# EAGLE board A13-OLinuXino_WIFI (EAGLE 4.16), part 1 of 3
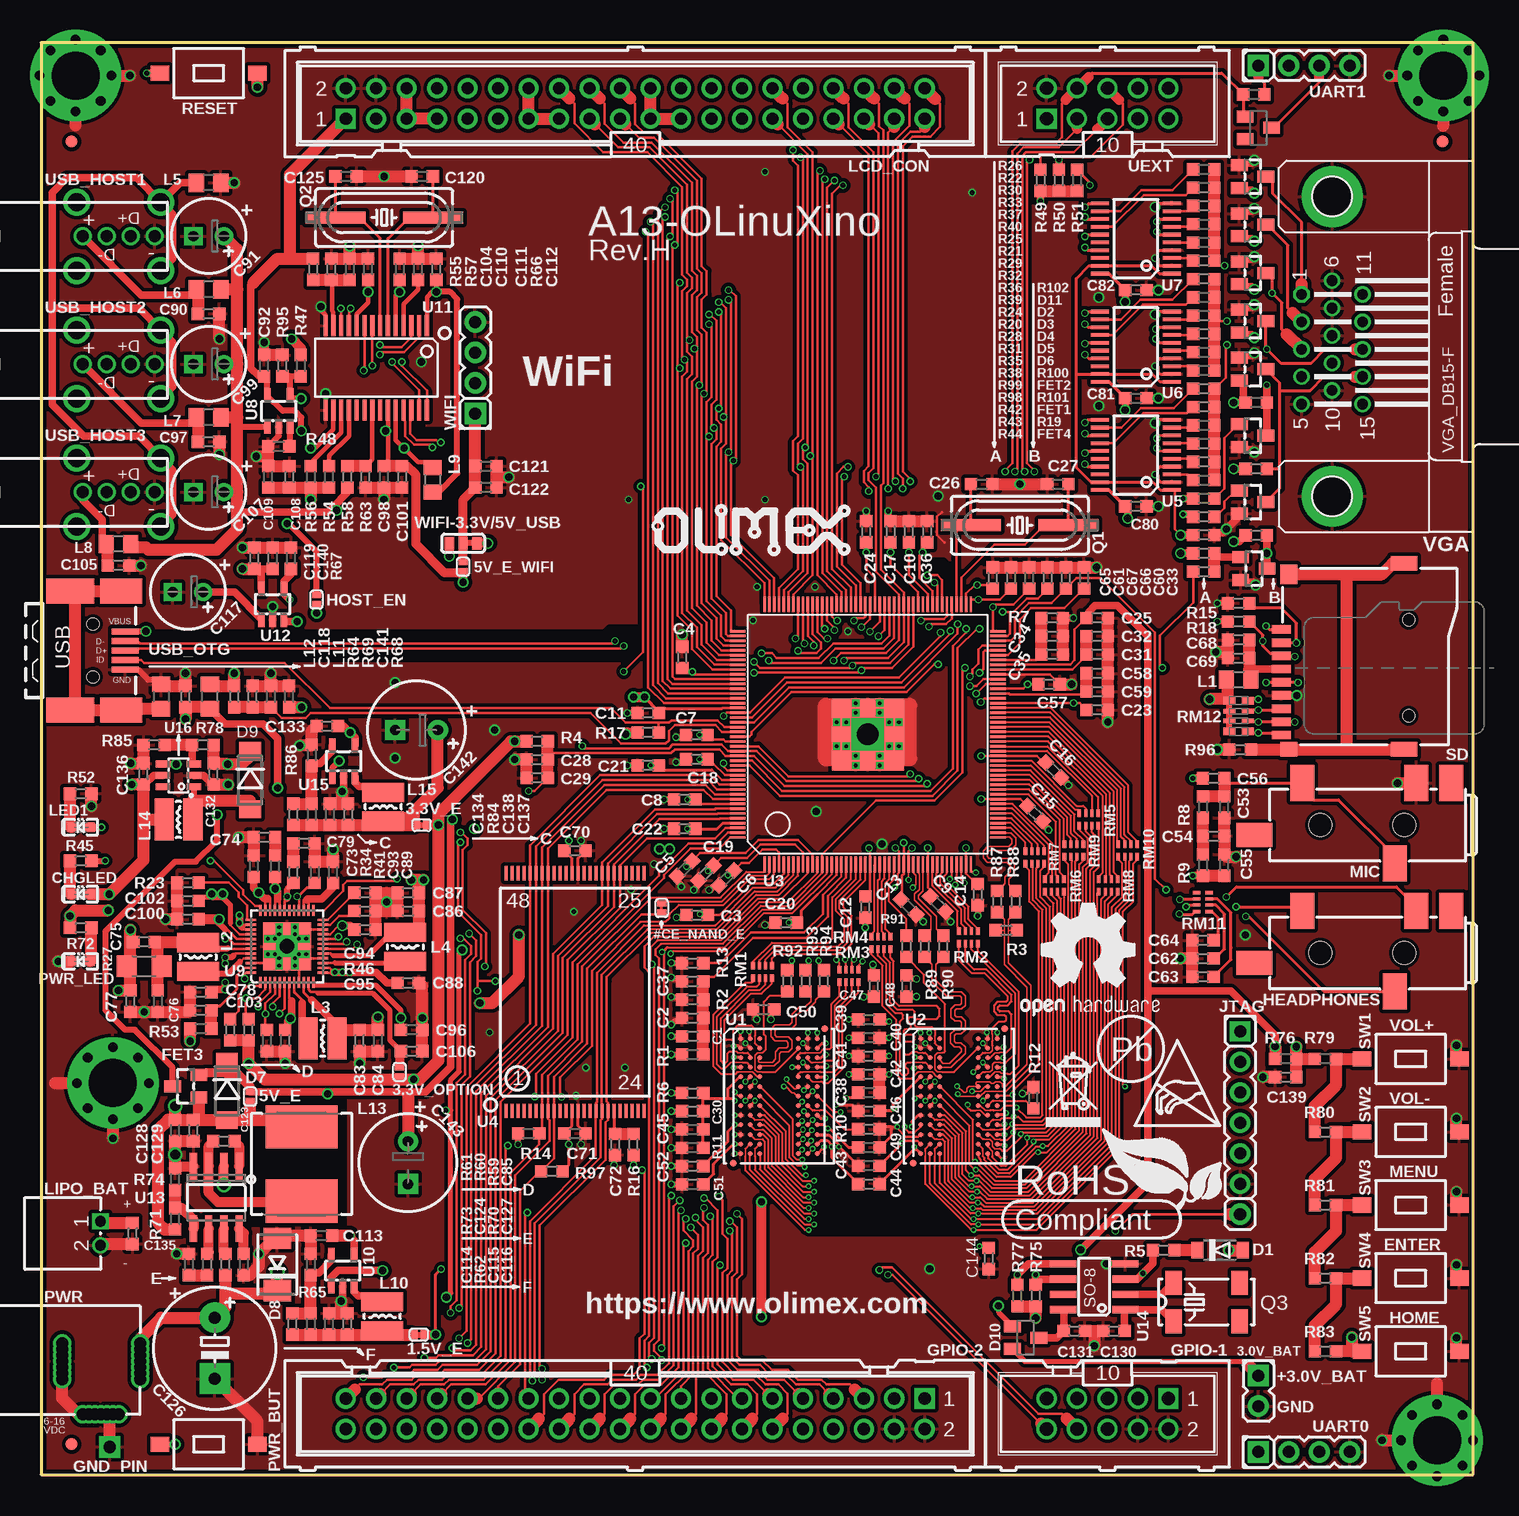
[diagram p0: board, top side]
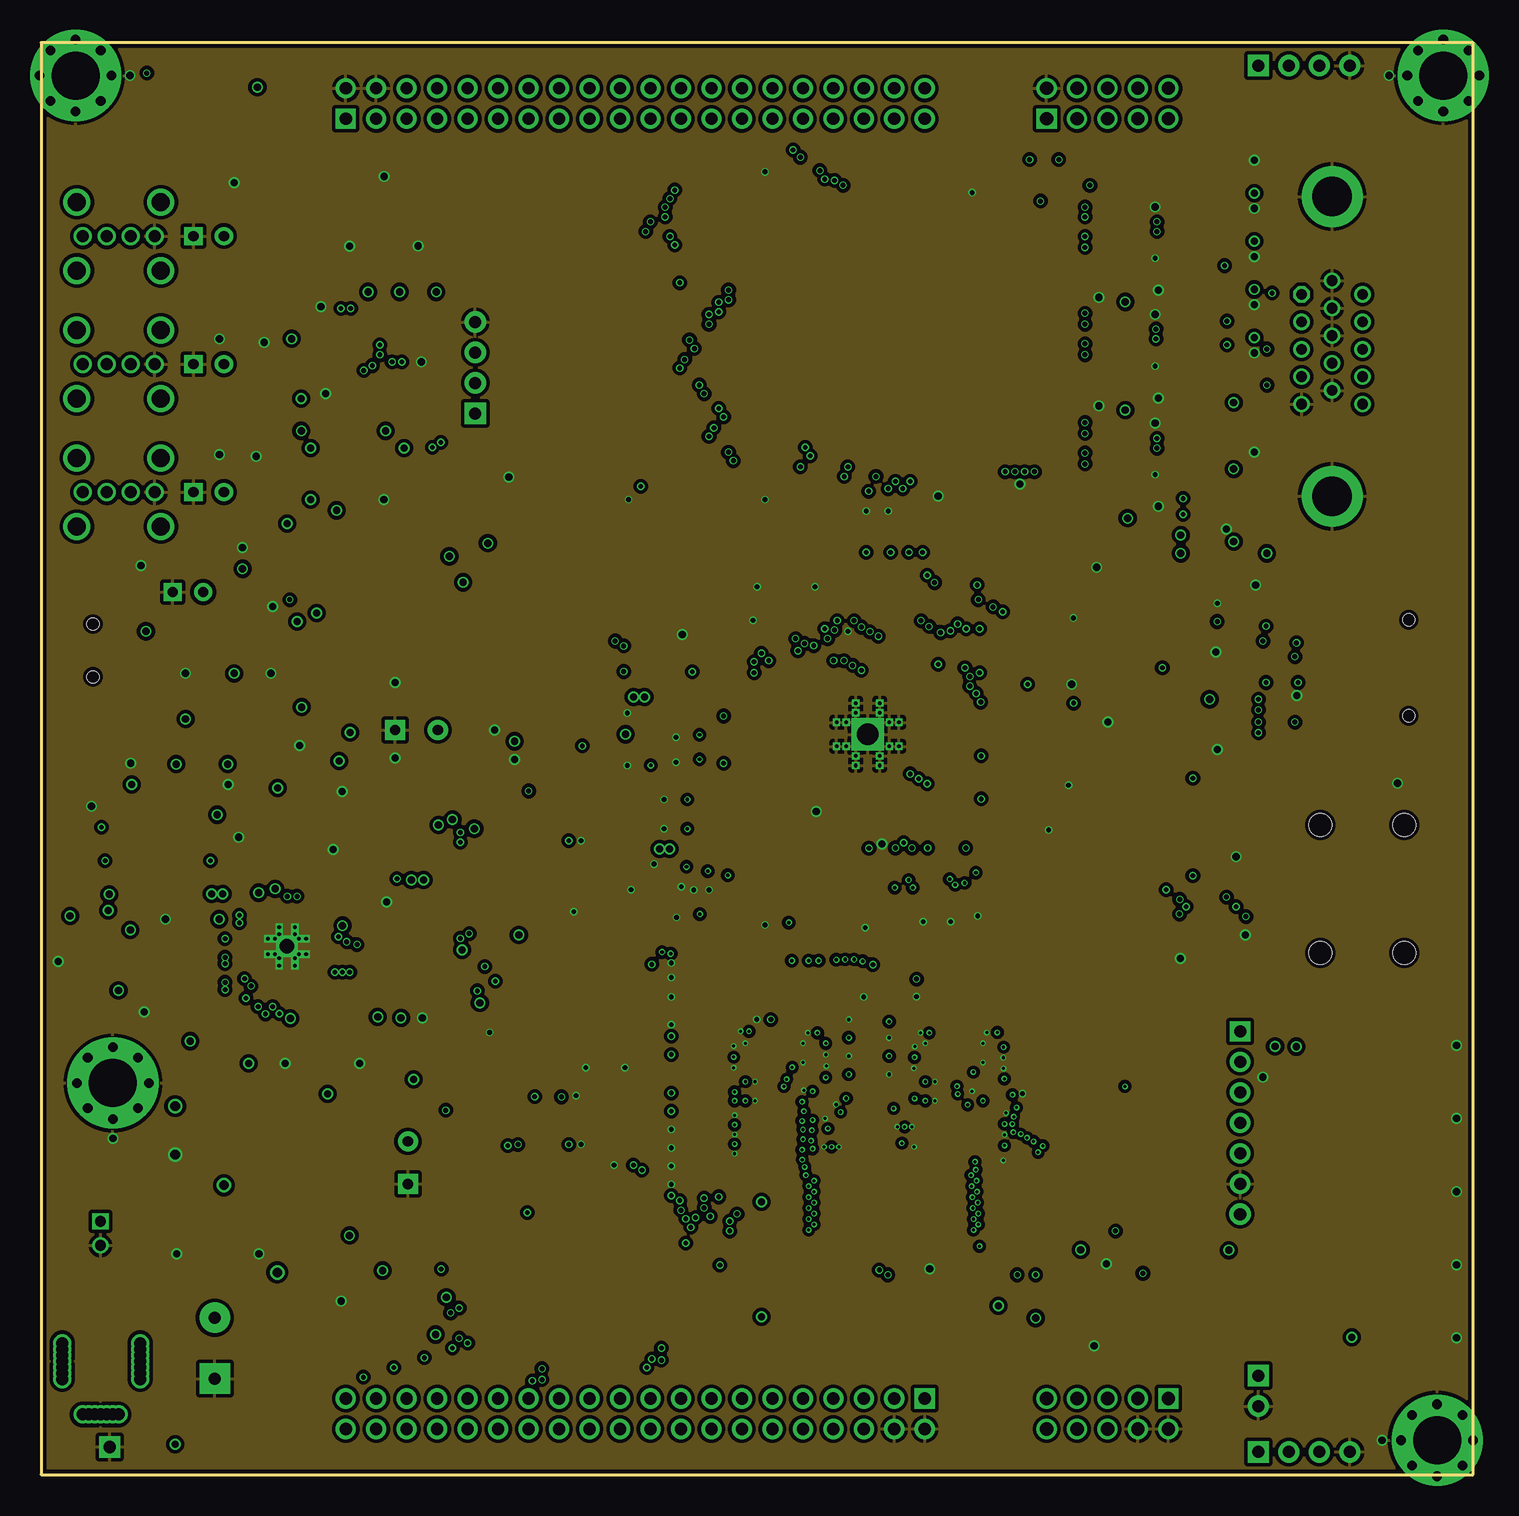
[diagram p1: board, inner layer Route2]
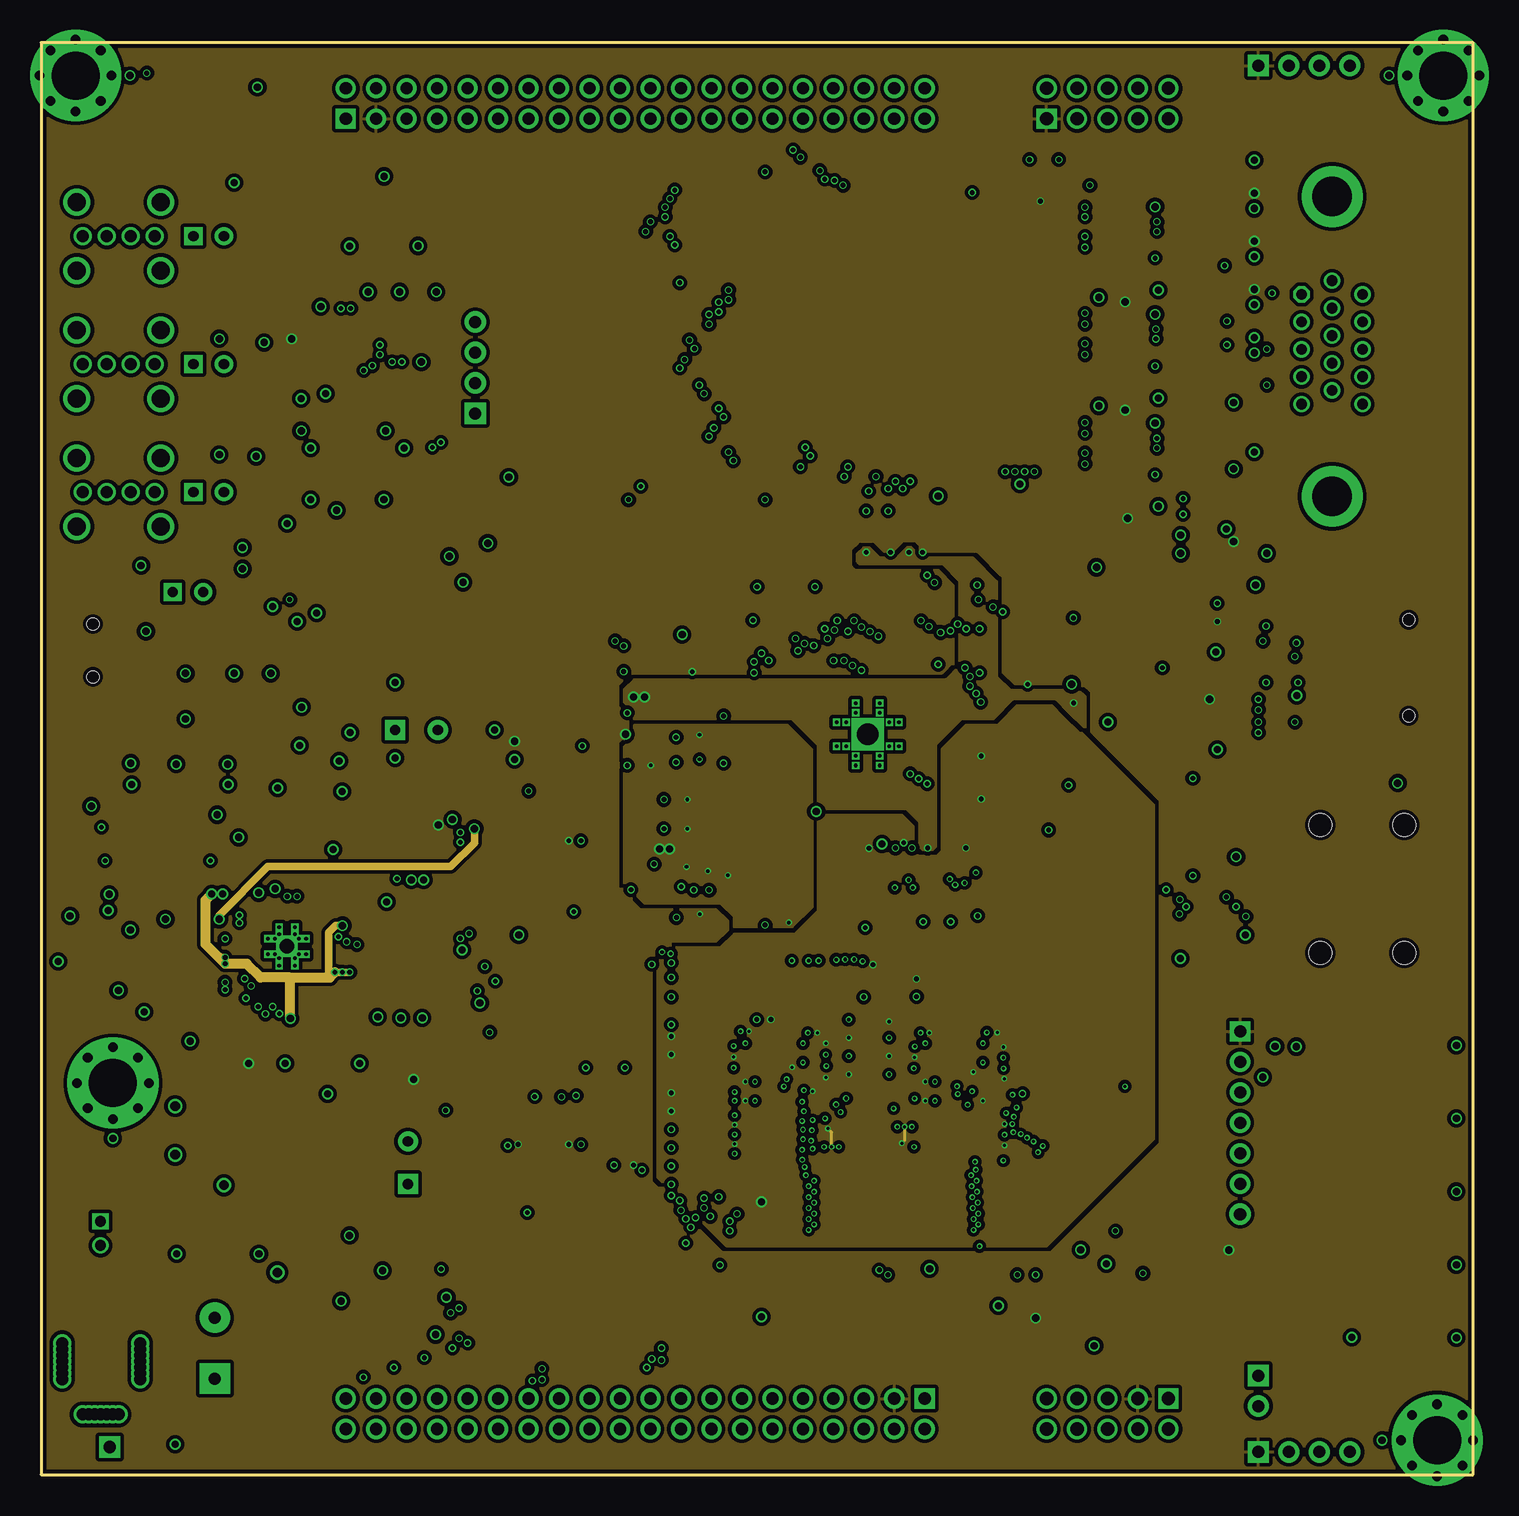
[diagram p2: board, inner layer Route15]
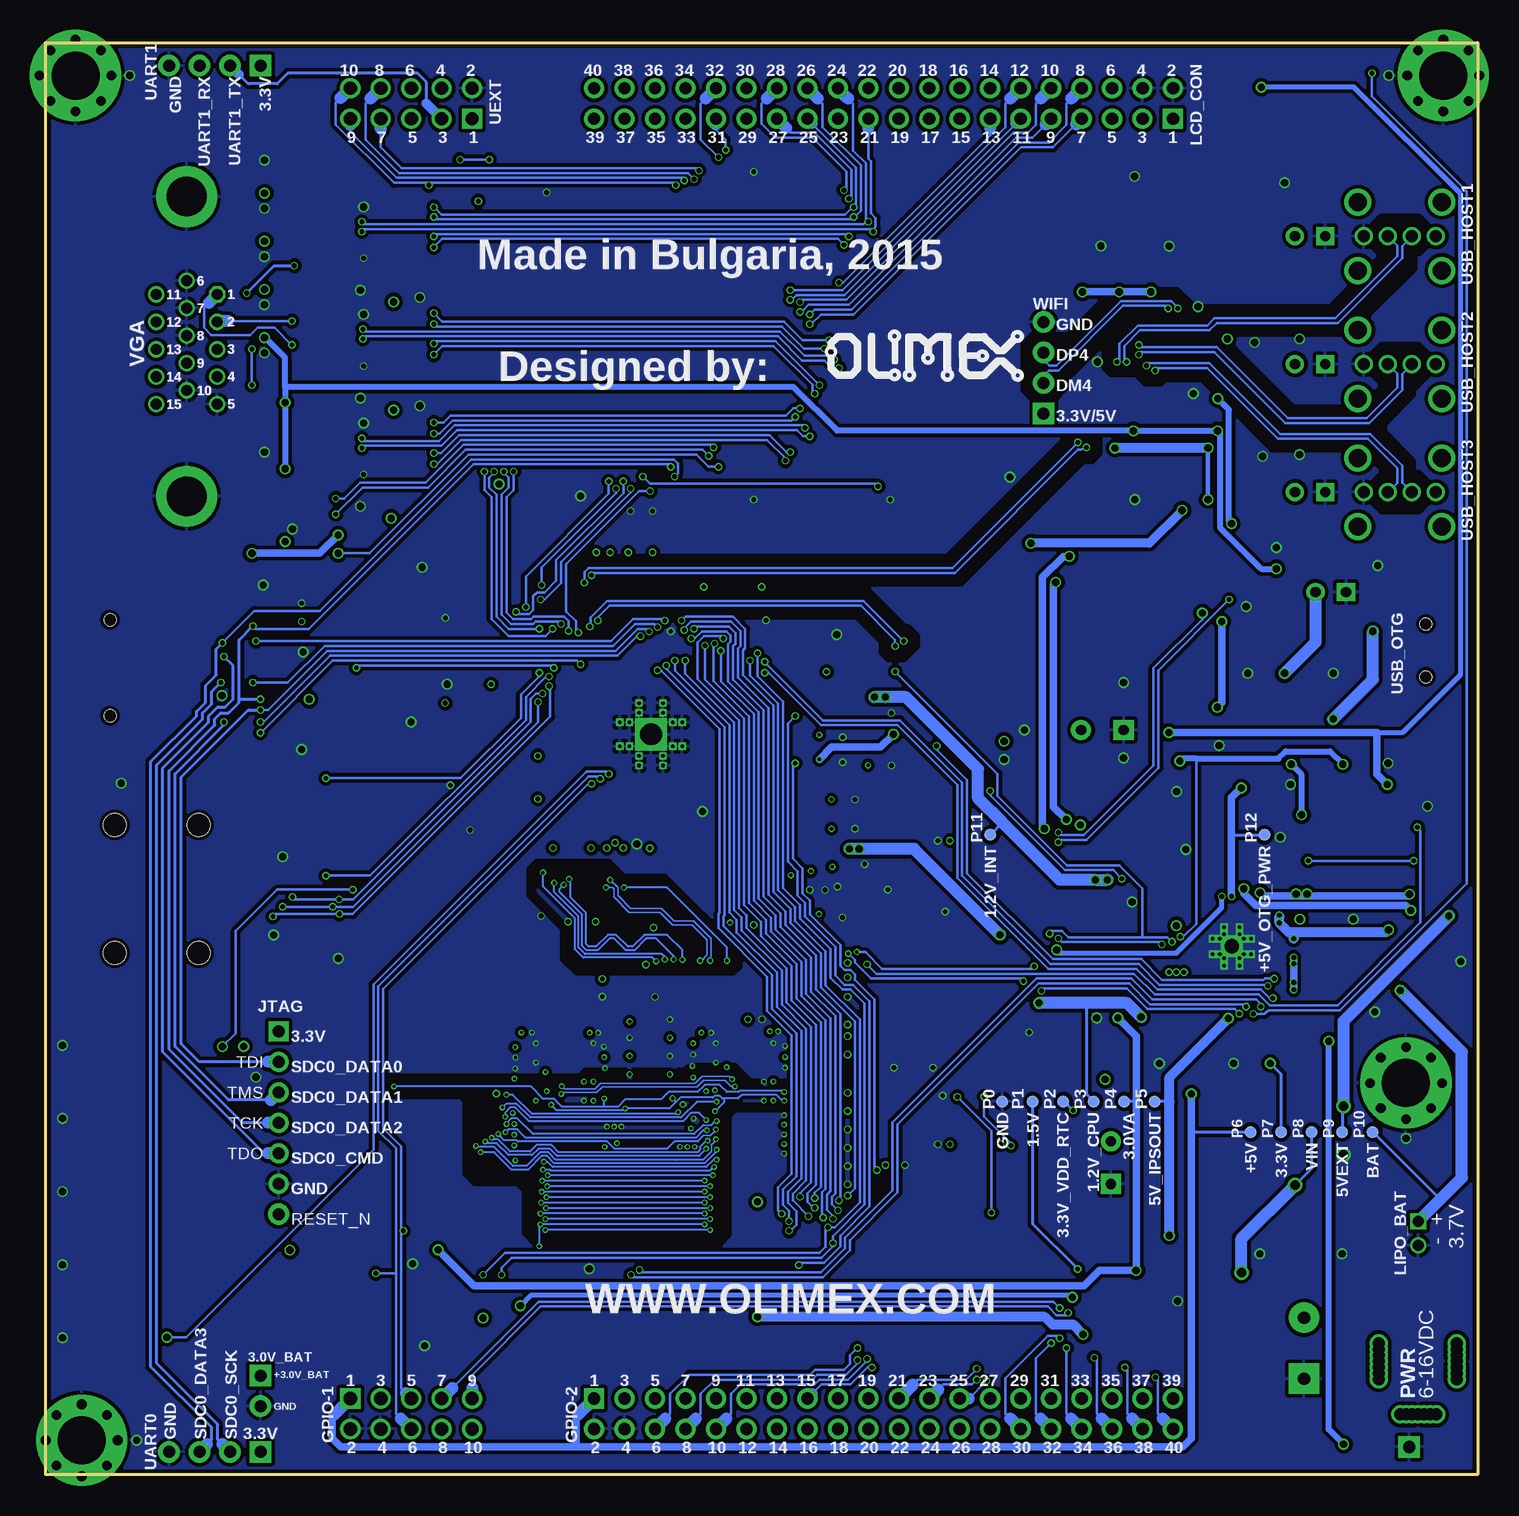
[diagram p3: board, bottom side, seen from below]

Size 119.38 x 119.38 mm. Coordinates in mm from the lower left corner, seen from the top.
Copper layers (1*2*15*16): Top 0.018mm / dielectric 0.12mm / Route2 0.035mm / dielectric 1.2mm / Route15 0.035mm / dielectric 0.12mm / Bottom 0.018mm
Design rules "default": minimum track width 4.5mil, minimum drill 10mil, track to track 0.1321mm, track to pad 0.1321mm, pad to pad 0.1321mm, via to via 0.1321mm, smd to smd 1mil, copper to edge 10mil, drill to drill 8mil, minimum pad ring 6mil, minimum via ring 4mil, stop-mask expansion 4mil, vias tented up to drill 25mil, thermal gap 12mil
tRestrict: 58 lines
bRestrict: 173 lines

## Footprints (pad centres in the part's own frame; a part is rotated, then mirrored left to right if it is on the bottom)
SJ_1_SMALLER_CLOSE = smd 0.508 x 0.762: 1 -0.381,0; 2 0.381,0
HN1X2 = drill 1 pad 1.778 square: 1 -1.27,0 | drill 1 pad 1.778 round: 2 1.27,0
SJ_1_SMALLER = smd 0.508 x 0.762: 1 -0.381,0; 2 0.381,0
SJ_1_SMALLER_CLOSE_10MILS = smd 0.508 x 0.762: 1 -0.381,0; 2 0.381,0
C0603_DWS = smd 1.016 x 1.016: 1 -0.889,0; 2 0.889,0
E2,5-6,3 = drill 0.864 pad 1.524 round: + -1.27,0 | drill 0.864 pad 1.524 square: - 1.27,0
E5-10,5 = drill 1.016 pad 2.54 round: + -2.54,0 | drill 1.016 pad 2.54 square: - 2.54,0
E3,5-8 = drill 0.864 pad 1.676 round: + -1.778,0 | drill 0.864 pad 1.676 square: - 1.778,0
LED-0603_TEST = smd 0.8 x 0.8: A 0.762,0; C -0.762,0
SOD-123 = smd 1 x 1.4: A 1.9,0; C -1.9,0
SOT23C(BAT54S) = smd 1.4 x 1: 1 1.1,-0.95; 2 1.1,0.95; 3 -1.1,0
MLL-41 = smd 1.45 x 1.8: A 2.445,0; K -2.445,0
DO214AA = smd 1.778 x 2.286: A 2.177,0; C -2.177,0
SOT23C = smd 1.4 x 1: 1 1.1,-0.95; 2 1.1,0.95; 3 -1.1,0
SOT23 = smd 1.4 x 1: 1 1.1,-0.95; 2 1.1,0.95; 3 -1.1,0
TEST_PAD40/70/SQUARE = drill 1.016 pad 1.778 square: P$1 0,0
ML10-MALE = drill 1.1 pad 1.676 square: 1 -5.08,-1.27 | drill 1.1 pad 1.676 round: 2 -5.08,1.27; 3 -2.54,-1.27; 4 -2.54,1.27; 5 0,-1.27; 6 0,1.27; 7 2.54,-1.27; 8 2.54,1.27; 9 5.08,-1.27; 10 5.08,1.27
ML40 = drill 1.016 pad 1.676 square: 1 -24.13,-1.27 | drill 1.016 pad 1.676 round: 2 -24.13,1.27; 3 -21.59,-1.27; 4 -21.59,1.27; 5 -19.05,-1.27; 6 -19.05,1.27; 7 -16.51,-1.27; 8 -16.51,1.27; 9 -13.97,-1.27; 10 -13.97,1.27; 11 -11.43,-1.27; 12 -11.43,1.27; 13 -8.89,-1.27; 14 -8.89,1.27; 15 -6.35,-1.27; 16 -6.35,1.27; 17 -3.81,-1.27; 18 -3.81,1.27; 19 -1.27,-1.27; 20 -1.27,1.27; 21 1.27,-1.27; 22 1.27,1.27; 23 3.81,-1.27; 24 3.81,1.27; 25 6.35,-1.27; 26 6.35,1.27; 27 8.89,-1.27; 28 8.89,1.27; 29 11.43,-1.27; 30 11.43,1.27; 31 13.97,-1.27; 32 13.97,1.27; 33 16.51,-1.27; 34 16.51,1.27; 35 19.05,-1.27; 36 19.05,1.27; 37 21.59,-1.27; 38 21.59,1.27; 39 24.13,-1.27; 40 24.13,1.27
PJ-W47S-05D2-LF_5PIN_V2 = smd 2 x 3: 1 2.1,-0.5; 2 14.5,-0.5; 3 6.8,6.2; 5 5,-0.5 | smd 3 x 2: 4 18.5,3.8 | hole 1.9: 6,3; 13,3
HN1X6 = drill 1 pad 1.676 square: 1 -6.35,0 | drill 1 pad 1.676 round: 2 -3.81,0; 3 -1.27,0; 4 1.27,0; 5 3.81,0; 6 6.35,0
L0805_5MIL_DWS = smd 1.27 x 1.524: 1 -1.016,0; 2 1.016,0
CD32 = smd 1.6 x 3.5: 1 -1.2,0; 2 1.2,0
8X8MM_3131 = smd 3.6 x 6: 1 -3.1,0; 2 3.1,0
DW02R = drill 0.9 square: 1 -1,0 | drill 0.9 round: 2 1,0
TESTPAD_40-ROUND = smd 1.016 x 1.016: 1 0,0
PWR_JACK_UNI_MILLING = drill 1 round: + 0,4.75; +1 0,5.25; +2 0,5.75; +3 0,6.25; +4 0,4.25; +5 0,3.75; +6 0,3.25; - -6.5,4.75; -1 -6.5,5.25; -2 -6.5,5.75; -3 -6.5,4.25; -4 -6.5,3.75; -5 -6.5,6.25; -6 -6.5,3.25; -- -3.3,0.3; --1 -3.8,0.3; --2 -4.3,0.3; --3 -4.8,0.3; --4 -2.8,0.3; --5 -2.3,0.3; --6 -1.8,0.3
SW-TAKT_6X3.5_SMD = smd 1.27 x 1.524: P$1 0,4.064; P$2 0,-4.064
HC49/SMD2_THIN = smd 5 x 1: 1 -4.064,0; 2 4.064,0
MC-306_TEST = smd 1.4 x 2: 1 -2.75,-1.6; 2 2.75,-1.6; 3 2.75,1.6; 4 -2.75,1.6
R0603_5MIL_DWS = smd 1.016 x 1.016: 1 -0.889,0; 2 0.889,0
R1206_5MIL_WS = smd 1.651 x 1.778: 1 -1.46,0; 2 1.46,0
TESTPAD = drill 1.016 pad 1.778 round: P$1 0,0
R_MATRIX_4_0402_25X625_BIGGEROUTPADS = smd 0.325 x 0.625: 1.1 -0.79,-0.512; 1.2 -0.79,0.512; 4.1 0.79,-0.512; 4.2 0.79,0.512 | smd 0.25 x 0.625: 2.1 -0.25,-0.512; 2.2 -0.25,0.512; 3.1 0.25,-0.512; 3.2 0.25,0.512
R_MATRIX_4 = smd 0.635 x 1.016: 1.1 -1.27,-0.762; 1.2 -1.27,0.762; 4.1 1.27,-0.762; 4.2 1.27,0.762 | smd 0.381 x 1.016: 2.1 -0.381,-0.762; 2.2 -0.381,0.762; 3.1 0.381,-0.762; 3.2 0.381,0.762
TFC-WPAPR-08 = smd 1.6 x 0.7: 1 -7.375,2.25; 2 -7.375,1.15; 3 -7.375,0.05; 4 -7.375,-1.05; 5 -7.375,-2.15; 6 -7.375,-3.25; 7 -7.375,-4.35; 8 -7.375,-5.45; 9 -7.375,-6.55 | smd 1.4 x 1.2: 10 -6.75,-7.75 | smd 1.4 x 1.6: 11 -6.75,6.85 | smd 2.2 x 1.2: 12 2.85,-7.75; 13 2.85,7.75 | hole 1: 3.25,-4.95; 3.25,3.05
FBGA78 = smd 0.4 x 0.4: A1 -4.8,-3.2; A2 -4.8,-2.4; A3 -4.8,-1.6; A7 -4.8,1.6; A8 -4.8,2.4; A9 -4.8,3.2; B1 -4,-3.2; B2 -4,-2.4; B3 -4,-1.6; B7 -4,1.6; B8 -4,2.4; B9 -4,3.2; C1 -3.2,-3.2; C2 -3.2,-2.4; C3 -3.2,-1.6; C7 -3.2,1.6; C8 -3.2,2.4; C9 -3.2,3.2; D1 -2.4,-3.2; D2 -2.4,-2.4; D3 -2.4,-1.6; D7 -2.4,1.6; D8 -2.4,2.4; D9 -2.4,3.2; E1 -1.6,-3.2; E2 -1.6,-2.4; E3 -1.6,-1.6; E7 -1.6,1.6; E8 -1.6,2.4; E9 -1.6,3.2; F1 -0.8,-3.2; F2 -0.8,-2.4; F3 -0.8,-1.6; F7 -0.8,1.6; F8 -0.8,2.4; F9 -0.8,3.2; G1 0,-3.2; G2 0,-2.4; G3 0,-1.6; G7 0,1.6; G8 0,2.4; G9 0,3.2; H1 0.8,-3.2; H2 0.8,-2.4; H3 0.8,-1.6; H7 0.8,1.6; H8 0.8,2.4; H9 0.8,3.2; J1 1.6,-3.2; J2 1.6,-2.4; J3 1.6,-1.6; J7 1.6,1.6; J8 1.6,2.4; J9 1.6,3.2; K1 2.4,-3.2; K2 2.4,-2.4; K3 2.4,-1.6; K7 2.4,1.6; K8 2.4,2.4; K9 2.4,3.2; L1 3.2,-3.2; L2 3.2,-2.4; L3 3.2,-1.6; L7 3.2,1.6; L8 3.2,2.4; L9 3.2,3.2; M1 4,-3.2; M2 4,-2.4; M3 4,-1.6; M7 4,1.6; M8 4,2.4; M9 4,3.2; N1 4.8,-3.2; N2 4.8,-2.4; N3 4.8,-1.6; N7 4.8,1.6; N8 4.8,2.4; N9 4.8,3.2 | smd 0.6 x 0.6: FID1 5.6,-3.8; FID2 -5.6,3.8
TQFP176 = smd 0.2 x 1.3: 1 -8.6,-10.85; 2 -8.2,-10.85; 3 -7.8,-10.85; 4 -7.4,-10.85; 5 -7,-10.85; 6 -6.6,-10.85; 7 -6.2,-10.85; 8 -5.8,-10.85; 9 -5.4,-10.85; 10 -5,-10.85; 11 -4.6,-10.85; 12 -4.2,-10.85; 13 -3.8,-10.85; 14 -3.4,-10.85; 15 -3,-10.85; 16 -2.6,-10.85; 17 -2.2,-10.85; 18 -1.8,-10.85; 19 -1.4,-10.85; 20 -1,-10.85; 21 -0.6,-10.85; 22 -0.2,-10.85; 23 0.2,-10.85; 24 0.6,-10.85; 25 1,-10.85; 26 1.4,-10.85; 27 1.8,-10.85; 28 2.2,-10.85; 29 2.6,-10.85; 30 3,-10.85; 31 3.4,-10.85; 32 3.8,-10.85; 33 4.2,-10.85; 34 4.6,-10.85; 35 5,-10.85; 36 5.4,-10.85; 37 5.8,-10.85; 38 6.2,-10.85; 39 6.6,-10.85; 40 7,-10.85; 41 7.4,-10.85; 42 7.8,-10.85; 43 8.2,-10.85; 44 8.6,-10.85; 89 8.6,10.85; 90 8.2,10.85; 91 7.8,10.85; 92 7.4,10.85; 93 7,10.85; 94 6.6,10.85; 95 6.2,10.85; 96 5.8,10.85; 97 5.4,10.85; 98 5,10.85; 99 4.6,10.85; 100 4.2,10.85; 101 3.8,10.85; 102 3.4,10.85; 103 3,10.85; 104 2.6,10.85; 105 2.2,10.85; 106 1.8,10.85; 107 1.4,10.85; 108 1,10.85; 109 0.6,10.85; 110 0.2,10.85; 111 -0.2,10.85; 112 -0.6,10.85; 113 -1,10.85; 114 -1.4,10.85; 115 -1.8,10.85; 116 -2.2,10.85; 117 -2.6,10.85; 118 -3,10.85; 119 -3.4,10.85; 120 -3.8,10.85; 121 -4.2,10.85; 122 -4.6,10.85; 123 -5,10.85; 124 -5.4,10.85; 125 -5.8,10.85; 126 -6.2,10.85; 127 -6.6,10.85; 128 -7,10.85; 129 -7.4,10.85; 130 -7.8,10.85; 131 -8.2,10.85; 132 -8.6,10.85 | smd 1.3 x 0.2: 45 10.85,-8.6; 46 10.85,-8.2; 47 10.85,-7.8; 48 10.85,-7.4; 49 10.85,-7; 50 10.85,-6.6; 51 10.85,-6.2; 52 10.85,-5.8; 53 10.85,-5.4; 54 10.85,-5; 55 10.85,-4.6; 56 10.85,-4.2; 57 10.85,-3.8; 58 10.85,-3.4; 59 10.85,-3; 60 10.85,-2.6; 61 10.85,-2.2; 62 10.85,-1.8; 63 10.85,-1.4; 64 10.85,-1; 65 10.85,-0.6; 66 10.85,-0.2; 67 10.85,0.2; 68 10.85,0.6; 69 10.85,1; 70 10.85,1.4; 71 10.85,1.8; 72 10.85,2.2; 73 10.85,2.6; 74 10.85,3; 75 10.85,3.4; 76 10.85,3.8; 77 10.85,4.2; 78 10.85,4.6; 79 10.85,5; 80 10.85,5.4; 81 10.85,5.8; 82 10.85,6.2; 83 10.85,6.6; 84 10.85,7; 85 10.85,7.4; 86 10.85,7.8; 87 10.85,8.2; 88 10.85,8.6; 133 -10.85,8.6; 134 -10.85,8.2; 135 -10.85,7.8; 136 -10.85,7.4; 137 -10.85,7; 138 -10.85,6.6; 139 -10.85,6.2; 140 -10.85,5.8; 141 -10.85,5.4; 142 -10.85,5; 143 -10.85,4.6; 144 -10.85,4.2; 145 -10.85,3.8; 146 -10.85,3.4; 147 -10.85,3; 148 -10.85,2.6; 149 -10.85,2.2; 150 -10.85,1.8; 151 -10.85,1.4; 152 -10.85,1; 153 -10.85,0.6; 154 -10.85,0.2; 155 -10.85,-0.2; 156 -10.85,-0.6; 157 -10.85,-1; 158 -10.85,-1.4; 159 -10.85,-1.8; 160 -10.85,-2.2; 161 -10.85,-2.6; 162 -10.85,-3; 163 -10.85,-3.4; 164 -10.85,-3.8; 165 -10.85,-4.2; 166 -10.85,-4.6; 167 -10.85,-5; 168 -10.85,-5.4; 169 -10.85,-5.8; 170 -10.85,-6.2; 171 -10.85,-6.6; 172 -10.85,-7; 173 -10.85,-7.4; 174 -10.85,-7.8; 175 -10.85,-8.2; 176 -10.85,-8.6 | smd 6 x 6: GND_PAD 0,0 | drill 1.8 pad 2.184 square: P$2 0,0 | drill 0.3 pad 0.406 square: P$3 -2.6,-1; P$4 -1.8,-1; P$5 -1,-2.6; P$6 -1,-1.8; P$7 1,-2.6; P$8 1,-1.8; P$9 2.6,-1; P$10 1.8,-1; P$11 -2.6,1; P$12 -1.8,1; P$13 2.6,1; P$14 1.8,1; P$15 -1,2.6; P$16 -1,1.8; P$17 1,2.6; P$18 1,1.8
TSOP48 = smd 1.2 x 0.25: 1 -9.9,5.75; 2 -9.9,5.25; 3 -9.9,4.75; 4 -9.9,4.25; 5 -9.9,3.75; 6 -9.9,3.25; 7 -9.9,2.75; 8 -9.9,2.25; 9 -9.9,1.75; 10 -9.9,1.25; 11 -9.9,0.75; 12 -9.9,0.25; 13 -9.9,-0.25; 14 -9.9,-0.75; 15 -9.9,-1.25; 16 -9.9,-1.75; 17 -9.9,-2.25; 18 -9.9,-2.75; 19 -9.9,-3.25; 20 -9.9,-3.75; 21 -9.9,-4.25; 22 -9.9,-4.75; 23 -9.9,-5.25; 24 -9.9,-5.75; 25 9.9,-5.75; 26 9.9,-5.25; 27 9.9,-4.75; 28 9.9,-4.25; 29 9.9,-3.75; 30 9.9,-3.25; 31 9.9,-2.75; 32 9.9,-2.25; 33 9.9,-1.75; 34 9.9,-1.25; 35 9.9,-0.75; 36 9.9,-0.25; 37 9.9,0.25; 38 9.9,0.75; 39 9.9,1.25; 40 9.9,1.75; 41 9.9,2.25; 42 9.9,2.75; 43 9.9,3.25; 44 9.9,3.75; 45 9.9,4.25; 46 9.9,4.75; 47 9.9,5.25; 48 9.9,5.75
PW = smd 0.3 x 1.5: 1 -2.925,-3; 2 -2.275,-3; 3 -1.625,-3; 4 -0.975,-3; 5 -0.325,-3; 6 0.325,-3; 7 0.975,-3; 8 1.625,-3; 9 2.275,-3; 10 2.925,-3; 11 2.925,3; 12 2.275,3; 13 1.625,3; 14 0.975,3; 15 0.325,3; 16 -0.325,3; 17 -0.975,3; 18 -1.625,3; 19 -2.275,3; 20 -2.925,3
SOT23-5 = smd 1.2 x 0.55: 1 1.3,-0.95; 2 1.3,0; 3 1.3,0.95; 4 -1.3,0.95; 5 -1.3,-0.95
QFN48 = smd 0.2 x 0.9: 1 -2.2,-3; 2 -1.8,-3; 3 -1.4,-3; 4 -1,-3; 5 -0.6,-3; 6 -0.2,-3; 7 0.2,-3; 8 0.6,-3; 9 1,-3; 10 1.4,-3; 11 1.8,-3; 12 2.2,-3; 25 2.2,3; 26 1.8,3; 27 1.4,3; 28 1,3; 29 0.6,3; 30 0.2,3; 31 -0.2,3; 32 -0.6,3; 33 -1,3; 34 -1.4,3; 35 -1.8,3; 36 -2.2,3 | smd 0.9 x 0.2: 13 3,-2.2; 14 3,-1.8; 15 3,-1.4; 16 3,-1; 17 3,-0.6; 18 3,-0.2; 19 3,0.2; 20 3,0.6; 21 3,1; 22 3,1.4; 23 3,1.8; 24 3,2.2; 37 -3,2.2; 38 -3,1.8; 39 -3,1.4; 40 -3,1; 41 -3,0.6; 42 -3,0.2; 43 -3,-0.2; 44 -3,-0.6; 45 -3,-1; 46 -3,-1.4; 47 -3,-1.8; 48 -3,-2.2 | drill 1.2 pad 1.422 square: N1 0,0 | drill 0.3 pad 0.4 square: N2 -1.6,0.65; N3 -1,0.65; N4 -1.6,-0.65; N5 -1,-0.65; N6 -0.65,-1.6; N7 -0.65,-1; N8 0.65,-1.6; N9 0.65,-1; N10 1.6,-0.65; N11 1,-0.65; N12 1.6,0.65; N13 1,0.65; N14 0.65,1.6; N15 0.65,1; N16 -0.65,1.6; N17 -0.65,1 | smd 4 x 4: VSS 0,0
SSOP28 = smd 0.35 x 1.75: 1 -4.225,-3.525; 2 -3.575,-3.525; 3 -2.925,-3.525; 4 -2.275,-3.525; 5 -1.625,-3.525; 6 -0.975,-3.525; 7 -0.325,-3.525; 8 0.325,-3.525; 9 0.975,-3.525; 10 1.625,-3.525; 11 2.275,-3.525; 12 2.925,-3.525; 13 3.575,-3.525; 14 4.225,-3.525; 15 4.225,3.525; 16 3.575,3.525; 17 2.925,3.525; 18 2.275,3.525; 19 1.625,3.525; 20 0.975,3.525; 21 0.325,3.525; 22 -0.325,3.525; 23 -0.975,3.525; 24 -1.625,3.525; 25 -2.275,3.525; 26 -2.925,3.525; 27 -3.575,3.525; 28 -4.225,3.525
SOIC8 = smd 0.6 x 2.2: 1 -1.905,-2.6; 2 -0.635,-2.6; 3 0.635,-2.6; 4 1.905,-2.6; 5 1.905,2.6; 6 0.635,2.6; 7 -0.635,2.6; 8 -1.905,2.6
SO-8 = smd 0.6 x 2.2: 1 -1.905,-2.6; 2 -0.635,-2.6; 3 0.635,-2.6; 4 1.905,-2.6; 5 1.905,2.6; 6 0.635,2.6; 7 -0.635,2.6; 8 -1.905,2.6
SOT23-6 = smd 1.2 x 0.55: 1 1.3,-0.95; 2 1.3,0; 3 1.3,0.95; 4 -1.3,0.95; 5 -1.3,0; 6 -1.3,-0.95
FIDUCIAL-1X2 = smd 1 x 1: 1 0,0
NANO-ITX_120X120 = drill 4 pad 7.6 round: GND 2.496,2.746; P$2 3.006,116.506; P$3 116.506,2.746; P$4 113.396,86.726 | drill 0.8 round: P$11 -0.504,2.746; P$12 5.496,2.746; P$13 2.496,5.746; P$14 2.496,-0.254; P$15 0.396,0.646; P$16 4.596,0.646; P$17 4.596,4.846; P$18 0.396,4.846; P$20 0.006,116.506; P$21 6.006,116.506; P$22 3.006,119.506; P$23 3.006,113.506; P$24 0.906,114.406; P$25 5.106,114.406; P$26 5.106,118.606; P$27 0.906,118.606; P$29 113.506,2.746; P$30 119.506,2.746; P$31 116.506,5.746; P$32 116.506,-0.254; P$33 114.406,0.646; P$34 118.606,0.646; P$35 118.606,4.846; P$36 114.406,4.846; P$38 110.396,86.726; P$39 116.396,86.726; P$40 113.396,89.726; P$41 113.396,83.726; P$42 111.296,84.626; P$43 115.496,84.626; P$44 115.496,88.826; P$45 111.296,88.826
HN1X4 = drill 1 pad 1.778 square: 1 -3.81,0 | drill 1 pad 1.778 round: 2 -1.27,0; 3 1.27,0; 4 3.81,0
USB_A_VERTICAL_PTH = drill 1 round: 1 3.45,12.75; 2 3.45,14.75; 3 3.45,16.75; 4 3.45,18.75 | drill 1.5 round: P$1 0.6,12.25; P$2 6.3,12.25; P$3 6.3,19.25; P$4 0.6,19.25
USB_MINI_9PIN = smd 2.25 x 0.5: D+ -3.722,0; D- -3.722,-0.8; GND -3.722,1.6; ID -3.722,0.8; VBUS -3.722,-1.6 | smd 4 x 2.1: GND1 0.884,-4.95; GND3 0.884,4.95 | smd 3.5 x 2.1: GND2 -3.366,-4.95; GND4 -3.366,4.95 | hole 1: -1.016,-2.2; -1.016,2.2
DB15-F_22MM = drill 0.9 octagon: 1 4.329,6.35 | drill 0.9 round: 2 2.043,6.35; 3 -0.243,6.35; 4 -2.529,6.35; 5 -4.815,6.35; 6 5.472,3.81; 7 3.186,3.81; 8 0.9,3.81; 9 -1.386,3.81; 10 -3.672,3.81; 11 4.329,1.27; 12 2.043,1.27; 13 -0.243,1.27; 14 -2.529,1.27; 15 -4.815,1.27 | drill 3.302 pad 5.08 round: GND1 -12.497,3.81; GND2 12.497,3.81
SJ_2_SMALL_12_TIED = smd 0.762 x 1.016: 1 -1.143,0; 2 0,0; 3 1.143,0

## Placement (x,y rotation side)
1.5V_E  Close  [SJ_1_SMALLER_CLOSE]  31.5,11.68 0 top
3.0V_BAT  NA(HN1X2)  [HN1X2]  101.47,6.99 270 top
3.3V_E  Close  [SJ_1_SMALLER_CLOSE]  31.72,54.15 0 top
3.3V_OPTION  Open  [SJ_1_SMALLER]  29.87,33.58 270 top
5V_E  Open  [SJ_1_SMALLER]  17.42,31.52 90 top
5V_E_WIFI  Open  [SJ_1_SMALLER]  35.18,75.69 90 top
#CE_NAND_E  Close  [SJ_1_SMALLER_CLOSE_10MILS]  51.74,47.24 90 top
C1  100nF  [C0603_DWS]  54.31,36.55 0 top
C2  100nF  [C0603_DWS]  54.31,38.07 0 top
C3  100nF  [C0603_DWS]  54.69,46.66 0 top
C4  100nF  [C0603_DWS]  53.44,68.12 270 top
C5  22uF/6.3V  [C0603_DWS]  53.65,50.52 45 top
C6  10uF/6.3V  [C0603_DWS]  57.14,49.74 45 top
C7  10uF/6.3V  [C0603_DWS]  54.66,61.67 0 top
C8  10uF/6.3V  [C0603_DWS]  53.64,56.29 0 top
C9  22uF/6.3V  [C0603_DWS]  74.75,47.57 135 top
C10  10uF/6.3V  [C0603_DWS]  72.34,78.61 270 top
C11  10uF/6.3V  [C0603_DWS]  50.6,63.5 0 top
C12  22uF/6.3V  [C0603_DWS]  68.71,47.32 90 top
C13  100nF  [C0603_DWS]  72.31,47.32 135 top
C14  10uF/6.3V  [C0603_DWS]  78.08,48.36 90 top
C15  100nF  [C0603_DWS]  82.85,55.12 135 top
C16  10uF/6.3V  [C0603_DWS]  84.38,58.75 135 top
C17  100nF  [C0603_DWS]  70.82,78.61 270 top
C18  22uF/6.3V  [C0603_DWS]  54.66,59.64 0 top
C19  100nF  [C0603_DWS]  55.43,50.16 45 top
C20  100nF  [C0603_DWS]  62.1,46.02 0 top
C21  100nF  [C0603_DWS]  50.6,59.13 0 top
C22  100nF  [C0603_DWS]  53.64,53.85 0 top
C23  100nF  [C0603_DWS]  88.04,63.75 180 top
C24  100nF  [C0603_DWS]  68.78,78.61 270 top
C25  22uF/6.3V  [C0603_DWS]  88.04,71.42 180 top
C26  33pF  [C0603_DWS]  78.41,82.58 180 top
C27  33pF  [C0603_DWS]  84.76,82.58 0 top
C28  1uF  [C0603_DWS]  41.35,59.61 0 top
C29  100nF  [C0603_DWS]  41.35,58.09 0 top
C30  100nF  [C0603_DWS]  54.31,30.3 0 top
C31  10uF/6.3V  [C0603_DWS]  88.04,68.38 180 top
C32  100nF  [C0603_DWS]  88.04,69.9 180 top
C33  1uF  [C0603_DWS]  86.94,74.75 270 top
C34  100nF  [C0603_DWS]  84.28,69.9 180 top
C35  10uF/6.3V  [C0603_DWS]  84.28,68.38 180 top
C36  100nF  [C0603_DWS]  73.86,78.61 270 top
C37  100nF  [C0603_DWS]  54.31,41.12 0 top
C38  100nF  [C0603_DWS]  69.01,31.85 180 top
C39  100nF  [C0603_DWS]  69.01,37.95 0 top
C40  100nF  [C0603_DWS]  69.01,36.42 180 top
C41  100nF  [C0603_DWS]  69.01,34.9 0 top
C42  22uF/6.3V  [C0603_DWS]  69.01,33.38 180 top
C43  100nF  [C0603_DWS]  69.01,25.76 0 top
C44  100nF  [C0603_DWS]  69.01,24.23 180 top
C45  100nF  [C0603_DWS]  54.31,28.78 0 top
C46  100nF  [C0603_DWS]  69.01,30.33 0 top
C47  100nF  [C0603_DWS]  69.42,40.74 90 top
C48  100nF  [C0603_DWS]  72.14,40.74 90 top
C49  100nF  [C0603_DWS]  69.01,27.28 180 top
C50  100nF  [C0603_DWS]  60.22,38.79 0 top
C51  100nF  [C0603_DWS]  54.31,24.21 0 top
C52  22uF/6.3V  [C0603_DWS]  54.31,25.73 0 top
C53  3.3nF  [C0603_DWS]  98.63,55.65 90 top
C54  10uF/6.3V  [C0603_DWS]  97.74,53.24 180 top
C55  10uF/6.3V  [C0603_DWS]  98.63,50.83 270 top
C56  100nF  [C0603_DWS]  97.74,58.06 180 top
C57  100nF  [C0603_DWS]  84.02,65.89 180 top
C58  10uF/6.3V  [C0603_DWS]  88.04,66.8 180 top
C59  100nF  [C0603_DWS]  88.04,65.28 180 top
C60  1nF  [C0603_DWS]  85.42,74.75 270 top
C61  1nF  [C0603_DWS]  80.85,74.75 270 top
C62  100nF  [C0603_DWS]  96.85,43.03 0 top
C63  100nF  [C0603_DWS]  96.85,41.5 0 top
C64  100nF  [C0603_DWS]  96.85,44.55 0 top
C65  1nF  [C0603_DWS]  79.32,74.75 270 top
C66  1nF  [C0603_DWS]  83.9,74.75 270 top
C67  1nF  [C0603_DWS]  82.37,74.75 270 top
C68  22uF/6.3V  [C0603_DWS]  99.82,69.6 0 top
C69  22uF/6.3V  [C0603_DWS]  99.82,68.07 0 top
C70  100nF  [C0603_DWS]  44.5,52.02 180 top
C71  22uF/6.3V  [C0603_DWS]  44.5,28.45 180 top
C72  100nF  [C0603_DWS]  47.85,27.53 90 top
C73  10uF/6.3V  [C0603_DWS]  17.73,50.72 270 top
C74  10uF/6.3V  [C0603_DWS]  18.62,53.14 0 top
C75  1uF  [C0603_DWS]  8.59,44.42 180 top
C76  10uF/6.3V  [C0603_DWS]  9.73,39.47 270 top
C77  10uF/6.3V  [C0603_DWS]  7.44,39.47 270 top
C78  10uF/6.3V  [C0603_DWS]  13.31,40.23 180 top
C79  10uF/6.3V  [C0603_DWS]  21.92,52.63 180 top
C80  100nF  [C0603_DWS]  91.26,80.72 0 top
C81  100nF  [C0603_DWS]  91.26,89.74 0 top
C82  100nF  [C0603_DWS]  91.26,98.76 0 top
C83  10uF/6.3V  [C0603_DWS]  26.54,36.2 270 top
C84  1nF  [C0603_DWS]  28.07,36.2 270 top
C85  10uF/6.3V  [C0603_DWS]  20.35,36.2 270 top
C86  10uF/6.3V  [C0603_DWS]  30.61,46.99 180 top
C87  1nF  [C0603_DWS]  30.61,48.51 180 top
C88  10uF/6.3V  [C0603_DWS]  30.61,41 0 top
C89  1uF  [C0603_DWS]  24.33,50.22 270 top
C90  100nF  [C0603_DWS]  13.97,96.77 0 top
C91  100uF/16V/LOWESR/105C/6.3x11mm_RM2.5  [E2,5-6,3]  13.97,103.25 180 top
C92  10uF/6.3V  [C0603_DWS]  18.59,92.46 90 top
C93  10uF/6.3V  [C0603_DWS]  22.81,50.22 90 top
C94  1uF  [C0603_DWS]  27,48.51 180 top
C95  10uF/6.3V  [C0603_DWS]  27,45.44 180 top
C96  10uF/6.3V  [C0603_DWS]  30.89,37.08 0 top
C97  100nF  [C0603_DWS]  13.97,86.11 0 top
C98  10uF/6.3V  [C0603_DWS]  28.57,83.19 270 top
C99  100uF/16V/LOWESR/105C/6.3x11mm_RM2.5  [E2,5-6,3]  13.97,92.58 180 top
C100  10uF/6.3V  [C0603_DWS]  12.24,46.3 180 top
C101  100nF  [C0603_DWS]  30.1,83.19 270 top
C102  10uF/6.3V  [C0603_DWS]  12.24,47.83 180 top
C103  1nF  [C0603_DWS]  13.31,38.71 0 top
C104  1uF  [C0603_DWS]  25.73,100.48 270 top
C105  100nF  [C0603_DWS]  6.45,75.79 0 top
C106  NA(10uF/6.3V)  [C0603_DWS]  30.89,35.31 0 top
C107  100uF/16V/LOWESR/105C/6.3x11mm_RM2.5  [E2,5-6,3]  13.97,81.92 180 top
C108  100nF  [C0603_DWS]  20.7,83.19 90 top
C109  10uF/6.3V  [C0603_DWS]  18.92,83.19 90 top
C110  100nF  [C0603_DWS]  27.25,100.48 90 top
C111  100nF  [C0603_DWS]  29.9,100.48 90 top
C112  100nF  [C0603_DWS]  32.94,100.48 90 top
C113  22uF/6.3V  [C0603_DWS]  23.37,19.94 180 top
C114  33pF  [C0603_DWS]  20.95,12.57 90 top
C115  22uF/6.3V  [C0603_DWS]  24,12.57 90 top
C116  22uF/6.3V  [C0603_DWS]  25.53,12.57 90 top
C117  100uF/16V/LOWESR/105C/6.3x11mm_RM2.5  [E2,5-6,3]  12.24,73.58 180 top
C118  100nF  [C0603_DWS]  12.04,64.87 90 top
C119  100nF  [C0603_DWS]  17.78,76.4 90 top
C120  33pF  [C0603_DWS]  31.78,108.23 0 top
C121  10uF/6.3V  [C0603_DWS]  37.08,84.07 0 top
C122  100nF  [C0603_DWS]  37.08,82.3 0 top
C123  10nF  [C0603_DWS]  15.24,27.81 180 top
C124  3.3nF  [C0603_DWS]  13.84,17.53 270 top
C125  33pF  [C0603_DWS]  25.43,108.23 180 top
C126  470uF/25V/LOWESR/105C  [E5-10,5]  14.48,10.54 270 top
C127  100nF  [C0603_DWS]  16.89,17.53 270 top
C128  22uF/6.3V  [C0603_DWS]  11.18,28.7 270 top
C129  22uF/6.3V  [C0603_DWS]  12.7,28.7 270 top
C130  10pF  [C0603_DWS]  89.43,11.99 180 top
C131  100nF  [C0603_DWS]  86.13,11.99 180 top
C132  22uF/6.3V  [C0603_DWS]  14.38,58.42 270 top
C133  22uF/6.3V  [C0603_DWS]  23.85,62.41 180 top
C134  33pF  [C0603_DWS]  21.03,55.04 90 top
C135  22uF/6.3V  [C0603_DWS]  7.62,20.12 90 top
C136  22uF/6.3V  [C0603_DWS]  8.53,58.42 270 top
C137  22uF/6.3V  [C0603_DWS]  25.6,55.04 90 top
C138  22uF/6.3V  [C0603_DWS]  24.08,55.04 90 top
C139  1nF  [C0603_DWS]  103.76,33.15 180 top
C140  22uF/6.3V  [C0603_DWS]  19.3,76.4 90 top
C141  100nF  [C0603_DWS]  19.15,64.87 90 top
C142  NA  [E3,5-8]  31.29,62.08 180 top
C143  NA  [E3,5-8]  30.58,26.01 270 top
C144  100pF  [C0603_DWS]  78.99,18.03 270 top
CHGLED  LED/YELLOW/0603  [LED-0603_TEST]  3.3,48.39 0 top
D1  1N5819(S4SOD-123)  [SOD-123]  98.27,18.72 0 top
D2  BAT54S  [SOT23C(BAT54S)]  100.99,108.2 180 top
D3  BAT54S  [SOT23C(BAT54S)]  100.99,104.19 180 top
D4  BAT54S  [SOT23C(BAT54S)]  100.99,100.18 180 top
D5  BAT54S  [SOT23C(BAT54S)]  100.99,96.16 180 top
D6  BAT54S  [SOT23C(BAT54S)]  100.99,92.15 180 top
D7  1N5822/SS34/SMA  [MLL-41]  15.49,32 270 top
D8  SMBJ16A  [DO214AA]  19.68,17.53 90 top
D9  1N5822/SS34/SMA  [MLL-41]  17.42,57.91 270 top
D10  BAT54C  [SOT23C]  82.07,11.43 180 top
D11  BAT54C  [SOT23C]  101.47,112.27 180 top
FET1  BSS138  [SOT23]  100.99,81.08 180 top
FET2  BSS138  [SOT23]  100.99,86.61 180 top
FET3  IRLML6402  [SOT23]  12.06,32.38 0 top
FET4  BSS138  [SOT23]  101.09,75.54 180 top
GND_PIN  TESTPAD3  [TEST_PAD40/70/SQUARE]  5.71,2.31 0 top
GPIO-1  BH10S  [ML10-MALE]  88.9,5.08 180 top
GPIO-2  BH40S  [ML40]  49.53,5.08 180 top
HEADPHONES  PJ-W47S-05D2-LF_V2  [PJ-W47S-05D2-LF_5PIN_V2]  119.63,46.48 180 top
HOST_EN  Open  [SJ_1_SMALLER]  22.96,72.95 90 top
JTAG  NA(HN1X6)  [HN1X6]  99.95,30.61 270 top
L1  FB0805/600R/2A  [L0805_5MIL_DWS]  99.82,66.29 0 top
L2  2.2uH/1.5A/DCR<0.1R/CD32  [CD32]  13.08,43.15 90 top
L3  2.2uH/1.5A/DCR<0.1R/CD32  [CD32]  23.47,36.37 0 top
L4  2.2uH/1.5A/DCR<0.1R/CD32  [CD32]  30.35,43.99 90 top
L5  FB0805/600R/2A  [L0805_5MIL_DWS]  13.97,107.7 180 top
L6  FB0805/600R/2A  [L0805_5MIL_DWS]  13.97,98.81 180 top
L7  FB0805/600R/2A  [L0805_5MIL_DWS]  13.97,88.14 180 top
L8  FB0805/600R/2A  [L0805_5MIL_DWS]  6.45,77.57 180 top
L9  FB0805/600R/2A  [L0805_5MIL_DWS]  32.64,82.93 270 top
L10  2.2uH/1.5A/DCR<0.1R/CD32  [CD32]  28.45,13.21 270 top
L11  FB0805/600R/2A  [L0805_5MIL_DWS]  14.07,64.87 90 top
L12  FB0805/600R/2A  [L0805_5MIL_DWS]  10.01,64.87 270 top
L13  10uH/3.15A/20%  [8X8MM_3131]  21.72,25.91 90 top
L14  2.2uH/1.5A/DCR<0.1R/CD32  [CD32]  11.46,54.61 0 top
L15  2.2uH/1.5A/DCR<0.1R/CD32  [CD32]  28.52,55.68 270 top
LCD_CON  BH40S  [ML40]  49.53,114.3 0 top
LED1  LED/GREEN/0603  [LED-0603_TEST]  3.3,53.98 0 top
LIPO_BAT  DW02R  [DW02R]  4.95,20.12 270 top
MIC  PJ-W47S-05D2-LF_V2  [PJ-W47S-05D2-LF_5PIN_V2]  119.63,57.15 180 top
P0  TESTPADTESTPAD_40-ROUND  [TESTPAD_40-ROUND]  39.62,31.11 0 bottom
P1  TESTPADTESTPAD_40-ROUND  [TESTPAD_40-ROUND]  37.08,31.11 0 bottom
P2  TESTPADTESTPAD_40-ROUND  [TESTPAD_40-ROUND]  34.54,31.11 0 bottom
P3  TESTPADTESTPAD_40-ROUND  [TESTPAD_40-ROUND]  32,31.11 0 bottom
P4  TESTPADTESTPAD_40-ROUND  [TESTPAD_40-ROUND]  29.46,31.11 0 bottom
P5  TESTPADTESTPAD_40-ROUND  [TESTPAD_40-ROUND]  26.92,31.11 0 bottom
P6  TESTPADTESTPAD_40-ROUND  [TESTPAD_40-ROUND]  18.92,28.57 0 bottom
P7  TESTPADTESTPAD_40-ROUND  [TESTPAD_40-ROUND]  16.38,28.57 0 bottom
P8  TESTPADTESTPAD_40-ROUND  [TESTPAD_40-ROUND]  13.84,28.57 0 bottom
P9  TESTPADTESTPAD_40-ROUND  [TESTPAD_40-ROUND]  11.3,28.57 0 bottom
P10  TESTPADTESTPAD_40-ROUND  [TESTPAD_40-ROUND]  8.76,28.57 0 bottom
P11  TESTPADTESTPAD_40-ROUND  [TESTPAD_40-ROUND]  40.64,53.34 0 bottom
P12  TESTPADTESTPAD_40-ROUND  [TESTPAD_40-ROUND]  17.78,53.34 0 bottom
PWR  PWRJ-2mm(YDJ-1134)  [PWR_JACK_UNI_MILLING]  8.26,4.72 0 top
PWR_BUT  T1107A(6x3.8x2.5mm)  [SW-TAKT_6X3.5_SMD]  13.97,2.54 270 top
PWR_LED  LED/RED/0603  [LED-0603_TEST]  3.3,42.8 0 top
Q1  Q24MHz/20pF/20ppm/2P/HC-49SM(SMD)  [HC49/SMD2_THIN]  81.58,79.15 180 top
Q2  Q12MHz/20pF/20ppm/2P/HC-49SM(SMD)  [HC49/SMD2_THIN]  28.6,104.8 0 top
Q3  Q32.768kHz/12.5pF/20ppm/4P/SMD8038  [MC-306_TEST]  97.16,14.4 0 top
R1  2k/1%  [R0603_5MIL_DWS]  54.31,35.03 180 top
R2  2k/1%  [R0603_5MIL_DWS]  54.31,39.6 0 top
R3  NA  [R0603_5MIL_DWS]  80.47,45.39 180 top
R4  47k  [R0603_5MIL_DWS]  41.35,61.14 180 top
R5  47k  [R0603_5MIL_DWS]  93.57,18.72 0 top
R6  2k/1%  [R0603_5MIL_DWS]  54.31,31.83 180 top
R7  200k/1%  [R0603_5MIL_DWS]  84.28,71.42 0 top
R8  2.2k  [R0603_5MIL_DWS]  96.85,55.65 90 top
R9  2.2k  [R0603_5MIL_DWS]  96.85,50.83 90 top
R10  240R/1%  [R0603_5MIL_DWS]  69.01,28.8 180 top
R11  2k/1%  [R0603_5MIL_DWS]  54.31,27.25 0 top
R12  240R/1%  [R0603_5MIL_DWS]  82.71,31.42 270 top
R13  240R/1%  [R0603_5MIL_DWS]  54.31,42.65 0 top
R14  10k  [R0603_5MIL_DWS]  40.64,28.45 0 top
R15  NA(1M)  [R0603_5MIL_DWS]  99.82,72.64 180 top
R16  10k  [R0603_5MIL_DWS]  49.38,27.53 90 top
R17  47k  [R0603_5MIL_DWS]  50.6,61.87 0 top
R18  10k  [R0603_5MIL_DWS]  99.82,71.12 180 top
R19  1.1k/1%  [R0603_5MIL_DWS]  101.3,78.31 180 top
R20  17.8k/1%  [R0603_5MIL_DWS]  96.93,89 0 top
R21  17.8k/1%  [R0603_5MIL_DWS]  96.93,98.15 0 top
R22  17.8k/1%  [R0603_5MIL_DWS]  96.93,107.29 0 top
R23  240R/1%  [R0603_5MIL_DWS]  12.24,49.35 0 top
R24  8.66k/1%  [R0603_5MIL_DWS]  96.93,90.53 0 top
R25  8.66k/1%  [R0603_5MIL_DWS]  96.93,99.67 0 top
R26  8.66k/1%  [R0603_5MIL_DWS]  96.93,108.81 0 top
R27  0.03R/1%  [R1206_5MIL_WS]  8.59,42.39 180 top
R28  4.32k/1%  [R0603_5MIL_DWS]  96.93,87.48 0 top
R29  4.32k/1%  [R0603_5MIL_DWS]  96.93,96.62 0 top
R30  4.32k/1%  [R0603_5MIL_DWS]  96.93,105.77 0 top
R31  2.2k/1%  [R0603_5MIL_DWS]  96.93,85.95 0 top
R32  2.2k/1%  [R0603_5MIL_DWS]  96.93,95.1 0 top
R33  2.2k/1%  [R0603_5MIL_DWS]  96.93,104.24 0 top
R34  1R  [R0603_5MIL_DWS]  19.51,50.72 270 top
R35  1.05k/1%  [R0603_5MIL_DWS]  96.93,84.43 0 top
R36  1.05k/1%  [R0603_5MIL_DWS]  96.93,93.57 0 top
R37  1.05k/1%  [R0603_5MIL_DWS]  96.93,102.72 0 top
R38  549R/1%  [R0603_5MIL_DWS]  96.93,82.91 0 top
R39  549R/1%  [R0603_5MIL_DWS]  96.93,92.05 0 top
R40  549R/1%  [R0603_5MIL_DWS]  96.93,101.19 0 top
R41  1R  [R0603_5MIL_DWS]  21.03,50.22 270 top
R42  NA  [R0603_5MIL_DWS]  96.93,78.33 180 top
R43  22R  [R0603_5MIL_DWS]  96.93,76.81 0 top
R44  NA  [R0603_5MIL_DWS]  96.93,75.29 180 top
R45  2.2k  [R0603_5MIL_DWS]  3.3,51.18 0 top
R46  200k/1%  [R0603_5MIL_DWS]  27,46.99 180 top
R47  10k  [R0603_5MIL_DWS]  21.64,92.46 270 top
R48  6.8k/1%  [R0603_5MIL_DWS]  19.81,85.72 0 top
R49  2.2k  [R0603_5MIL_DWS]  83.31,107.9 270 top
R50  2.2k  [R0603_5MIL_DWS]  84.84,107.9 270 top
R51  47k  [R0603_5MIL_DWS]  86.36,107.9 270 top
R52  2.2k  [R0603_5MIL_DWS]  3.3,56.77 180 top
R53  2.2k  [R0603_5MIL_DWS]  13.31,37.19 0 top
R54  47k  [R0603_5MIL_DWS]  24,83.19 90 top
R55  10k  [R0603_5MIL_DWS]  22.68,100.48 90 top
R56  10k  [R0603_5MIL_DWS]  22.48,83.19 90 top
R57  NA(47k)  [R0603_5MIL_DWS]  24.21,100.48 90 top
R58  NA(5.1k)  [R0603_5MIL_DWS]  25.53,83.19 270 top
R59  2.2k  [R0603_5MIL_DWS]  18.82,36.2 90 top
R60  2.2k  [R0603_5MIL_DWS]  17.3,37.08 270 top
R61  2.2k  [R0603_5MIL_DWS]  15.77,37.08 270 top
R62  4.99k/1%  [R0603_5MIL_DWS]  22.48,12.57 90 top
R63  NA(10k)  [R0603_5MIL_DWS]  27.05,83.19 90 top
R64  47k  [R0603_5MIL_DWS]  16.1,64.87 90 top
R65  3.3k/1%  [R0603_5MIL_DWS]  22.48,17.53 90 top
R66  680R/1%  [R0603_5MIL_DWS]  31.42,100.48 270 top
R67  200k/1%  [R0603_5MIL_DWS]  20.83,76.4 270 top
R68  13k/1%  [R0603_5MIL_DWS]  20.68,64.87 270 top
R69  100k/1%  [R0603_5MIL_DWS]  17.63,64.87 270 top
R70  47k  [R0603_5MIL_DWS]  15.37,17.53 90 top
R71  4.99k/1%  [R0603_5MIL_DWS]  11.18,21.34 270 top
R72  2.2k  [R0603_5MIL_DWS]  3.3,45.59 0 top
R73  2.2k  [R0603_5MIL_DWS]  12.32,17.53 90 top
R74  1.05k/1%  [R0603_5MIL_DWS]  11.18,24.64 90 top
R75  2.2k  [R0603_5MIL_DWS]  82.91,14.94 270 top
R76  100k/1%  [R0603_5MIL_DWS]  103.76,34.67 0 top
R77  2.2k  [R0603_5MIL_DWS]  81.38,14.94 270 top
R78  8.2k/1%  [R0603_5MIL_DWS]  13.49,60.83 0 top
R79  6.8k/1%  [R0603_5MIL_DWS]  107.06,34.67 0 top
R80  8.2k/1%  [R0603_5MIL_DWS]  107.06,28.57 0 top
R81  10k/1%  [R0603_5MIL_DWS]  107.06,22.48 0 top
R82  11k/1%  [R0603_5MIL_DWS]  107.06,16.38 0 top
R83  13k/1%  [R0603_5MIL_DWS]  107.06,10.29 0 top
R84  4.99k/1%  [R0603_5MIL_DWS]  22.56,55.04 90 top
R85  1.1k/1%  [R0603_5MIL_DWS]  9.42,60.83 180 top
R86  1.1k/1%  [R0603_5MIL_DWS]  22.56,59.99 90 top
R87  22R  [R0603_5MIL_DWS]  79.71,47.78 90 top
R88  22R  [R0603_5MIL_DWS]  81.23,47.78 90 top
R89  22R  [R0603_5MIL_DWS]  73.66,44.04 90 top
R90  22R  [R0603_5MIL_DWS]  75.21,44.04 90 top
R91  22R  [R0603_5MIL_DWS]  72.14,44.04 90 top
R92  22R  [R0603_5MIL_DWS]  62.2,41.17 90 top
R93  22R  [R0603_5MIL_DWS]  63.73,41.17 90 top
R94  22R  [R0603_5MIL_DWS]  65.25,41.17 90 top
R95  NA  [R0603_5MIL_DWS]  20.12,92.46 270 top
R96  10k  [R0603_5MIL_DWS]  99.95,60.45 180 top
R97  10k  [R0603_5MIL_DWS]  42.57,25.3 180 top
R98  22R  [R0603_5MIL_DWS]  96.93,79.86 0 top
R99  22R  [R0603_5MIL_DWS]  96.93,81.38 0 top
R100  1.1k/1%  [R0603_5MIL_DWS]  101.3,89.38 180 top
R101  1.1k/1%  [R0603_5MIL_DWS]  101.3,83.85 180 top
R102  4.32k/1%  [R0603_5MIL_DWS]  101.09,115.06 0 top
RESET  T1107A(6x3.8x2.5mm)  [SW-TAKT_6X3.5_SMD]  13.97,116.84 90 top
RESET_N  TESTPAD40/70  [TESTPAD]  99.95,21.72 0 top
RM1  RA0805_(4X0402)_22R  [R_MATRIX_4_0402_25X625_BIGGEROUTPADS]  60.12,41.91 180 top
RM2  RA0805_(4X0402)_22R  [R_MATRIX_4_0402_25X625_BIGGEROUTPADS]  77.32,44.78 180 top
RM3  RA0805_(4X0402)_22R  [R_MATRIX_4_0402_25X625_BIGGEROUTPADS]  67.34,41.58 180 top
RM4  RA0805_(4X0402)_22R  [R_MATRIX_4_0402_25X625_BIGGEROUTPADS]  70,44.32 180 top
RM5  RA0805_(4X0402)_22R  [R_MATRIX_4_0402_25X625_BIGGEROUTPADS]  87.33,54.61 180 top
RM6  RA0805_(4X0402)_22R  [R_MATRIX_4_0402_25X625_BIGGEROUTPADS]  84.45,49.12 180 top
RM7  RA0805_(4X0402)_22R  [R_MATRIX_4_0402_25X625_BIGGEROUTPADS]  82.83,51.46 180 top
RM8  RA0805_(4X0402)_22R  [R_MATRIX_4_0402_25X625_BIGGEROUTPADS]  88.95,49.12 180 top
RM9  RA0805_(4X0402)_22R  [R_MATRIX_4_0402_25X625_BIGGEROUTPADS]  86.08,52.05 180 top
RM10  RA0805_(4X0402)_22R  [R_MATRIX_4_0402_25X625_BIGGEROUTPADS]  90.58,52.04 180 top
RM11  RA0805_(4X0402)_22R  [R_MATRIX_4_0402_25X625_BIGGEROUTPADS]  96.85,47.73 90 top
RM12  RA1206_(4X0603)_4B8_100K  [R_MATRIX_4]  99.82,63.25 270 top
SD  MICRO_SD/MMC_CP_NEWTFC-WPAPR-08  [TFC-WPAPR-08]  110.75,68.21 0 top
SW1  T1107A(6x3.8x2.5mm)  [SW-TAKT_6X3.5_SMD]  114.17,34.67 270 top
SW2  T1107A(6x3.8x2.5mm)  [SW-TAKT_6X3.5_SMD]  114.17,28.57 270 top
SW3  T1107A(6x3.8x2.5mm)  [SW-TAKT_6X3.5_SMD]  114.17,22.48 270 top
SW4  T1107A(6x3.8x2.5mm)  [SW-TAKT_6X3.5_SMD]  114.17,16.38 270 top
SW5  T1107A(6x3.8x2.5mm)  [SW-TAKT_6X3.5_SMD]  114.17,10.29 270 top
U1  K4B2G0846Q-BCKO  [FBGA78]  61.51,31.57 270 top
U2  K4B2G0846Q-BCKO  [FBGA78]  76.51,31.57 270 top
U3  A13  [TQFP176]  68.91,61.72 0 top
U4  H27UBG8T2BTR  [TSOP48]  44.5,40.23 90 top
U5  SN74ALVC244  [PW]  91.26,85.01 90 top
U6  SN74ALVC244  [PW]  91.26,94.03 90 top
U7  SN74ALVC244  [PW]  91.26,103.05 90 top
U8  SY6280  [SOT23-5]  19.81,88.67 270 top
U9  AXP209(QFN48)  [QFN48]  20.5,44.04 0 top
U10  SY8009AAAC(SOT23-5)  [SOT23-5]  25.15,17.02 270 top
U11  GL850G-HHGXX  [SSOP28]  27.94,92.28 180 top
U12  SY6280  [SOT23-5]  19.3,72.57 270 top
U13  MP1482DS  [SOIC8]  14.61,23.11 180 top
U14  PCF8563T/5  [SO-8]  87.78,15.67 90 top
U15  SY8009AAAC(SOT23-5)  [SOT23-5]  25.22,59.49 270 top
U16  MT3608(SOT23-6)  [SOT23-6]  11.46,58.29 0 top
U$1  FIDUCIAL1X2  [FIDUCIAL-1X2]  2.54,2.54 180 top
U$2  FIDUCIAL1X2  [FIDUCIAL-1X2]  2.54,111.12 180 top
U$3  FIDUCIAL1X2  [FIDUCIAL-1X2]  116.84,111.12 180 top
U$4  NANO_ITX  [NANO-ITX_120X120]  119.38,119.38 180 top
U$5  [LOGO-OPENHARDWARE_8X8]  87.27,43.66 0 top
U$6  [OLIMEX1_V]  36.68,91.01 0 bottom
U$8  [OLIMEX1_V]  68.63,76.48 0 top
U$9  [PB]  90.83,35.48 0 top
U$10  [ESD_SYMBOL]  91.16,29.11 0 top
U$11  [RECYCLE_BIN1/8]  83.74,29.01 0 top
U$12  [ROHS]  81.15,20.4 0 top
UART0  NA(HN1X4)  [HN1X4]  105.28,1.91 0 top
UART1  HN1X4  [HN1X4]  105.28,117.47 0 top
UEXT  BH10S  [ML10-MALE]  88.9,114.3 0 top
USB_HOST1  USB_A_VERTICAL  [USB_A_VERTICAL_PTH]  -9.27,106.68 270 top
USB_HOST2  USB_A_VERTICAL  [USB_A_VERTICAL_PTH]  -9.27,96.01 270 top
USB_HOST3  USB_A_VERTICAL  [USB_A_VERTICAL_PTH]  -9.27,85.34 270 top
USB_OTG  USB-OTG  [USB_MINI_9PIN]  3.3,68.71 180 top
VGA_DB15-F  VGA15  [DB15-F_22MM]  111.43,94.06 90 top
WIFI  HN1X4  [HN1X4]  36.2,92.28 90 top
WIFI-3.3V/5V_USB  WIFI-3.3V:Opened/5V_USB:Closed  [SJ_2_SMALL_12_TIED]  35.18,77.65 180 top

## Library data of the parts
1.5V_E 3.3V_E 3.3V_OPTION 5V_E 5V_E_WIFI #CE_NAND_E HOST_EN WIFI-3.3V/5V_USB = jumper
3.0V_BAT FET1-FET4 JTAG LIPO_BAT UART0 UART1 WIFI = Penko
C1-C144 L1 L5-L9 L11 L12 R1-R102 = rcl
CHGLED LED1 PWR_LED = DOUBLE-SIDE
D1 D7 D9 GND_PIN HEADPHONES MIC P0 P1-P12 PWR PWR_BUT RESET RESET_N SW1-SW5 = gogo
D2-D6 D10 D11 = semicon-smd-ipc
D8 L2-L4 L10 L13-L15 RM1-RM12 = OLIMEX_DISCRET
GPIO-1 GPIO-2 LCD_CON UEXT = con-harting-ml
Q1-Q3 = crystal
SD USB_HOST1-USB_HOST3 USB_OTG VGA_DB15-F = OLIMEX_CONNECTORS
U1-U4 U8-U16 = OLIMEX_IC
U5-U7 = 74AC244
U$1-U$3 = SparkFunEagle-6-6-07
U$4 = OLIMEX_CASES
U$5 U$6 U$8-U$12 = olimex_logo1

## Nets
#OVCUR1: R58.1 R63.2 U11.21
+5V: 5V_E.2 5V_E_WIFI.1 C92.1 C98.1 C101.1 C119.1 C140.1 C143.+ D5.2 D6.2 D7.K FET3.2 GPIO-1.1 GPIO-2.1 LCD_CON.1 P6.1 R55.2 R100.2 R101.2 U8.5 U11.23 U12.5
+5V_OTG_PWR: C118.1 L11.1 P12.1 R41.2 U9.31 USB_OTG.VBUS
+15V: 5V_E.1 C128.1 C129.1 D7.A FET3.1 L13.2 P9.1 R34.2 R71.2 R72.1 U9.32 U9.33
+24V: C75.2 C77.1 C135.2 LIPO_BAT.1 P10.1 R27.2 U9.38 U9.39 U9.42
A0: RM5.1.2 U1.K3 U2.K3
A1: RM6.3.2 U1.L7 U2.L7
A2: RM8.3.2 U1.L3 U2.L3
A3: RM8.4.2 U1.K2 U2.K2
A4: RM6.4.2 U1.L8 U2.L8
A5: RM8.2.2 U1.L2 U2.L2
A6: RM6.2.2 U1.M8 U2.M8
A7: RM10.2.2 U1.M2 U2.M2
A8: RM6.1.2 U1.N8 U2.N8
A9: RM10.4.2 U1.M3 U2.M3
A10: RM7.3.2 U1.H7 U2.H7
A11: RM9.4.2 U1.M7 U2.M7
A12: RM7.1.2 U1.K7 U2.K7
A13: RM8.1.2 U1.N3 U2.N3
A14: RM9.3.2 U1.N7 U2.N7
AVDD: C110.1 C111.1 C112.1 L9.2 U11.1 U11.5 U11.10
BA0: RM5.2.2 U1.J2 U2.J2
BA1: RM7.2.2 U1.K8 U2.K8
BA2: RM5.3.2 U1.J3 U2.J3
CASN: RM9.1.2 U1.G3 U2.G3
CKE: RM7.4.2 U1.G9 U2.G9
CLK: R3.2 R87.1 U1.F7 U2.F7
CLKN: R3.1 R88.1 U1.G7 U2.G7
D0: RM1.1.2 U1.B3
D1: RM3.4.2 U1.C7
D2: RM1.2.2 U1.C2
D3: RM3.3.2 U1.C8
D4: RM1.4.2 U1.E3
D5: RM3.1.2 U1.E8
D6: RM1.3.2 U1.D2
D7: RM3.2.2 U1.E7
D8: RM2.3.2 U2.C8
D9: RM4.3.2 U2.D2
D10: RM2.1.2 U2.E8
D11: RM4.4.2 U2.E3
D12: RM2.4.2 U2.C7
D13: RM4.2.2 U2.C2
D14: RM2.2.2 U2.E7
D15: RM4.1.2 U2.B3
DDR3_A0: RM5.1.1 U3.64
DDR3_A1: RM6.3.1 U3.52
DDR3_A2: RM8.3.1 U3.66
DDR3_A3: RM8.4.1 U3.65
DDR3_A4: RM6.4.1 U3.51
DDR3_A5: RM8.2.1 U3.67
DDR3_A6: RM6.2.1 U3.54
DDR3_A7: RM10.2.1 U3.71
DDR3_A8: RM6.1.1 U3.55
DDR3_A9: RM10.4.1 U3.69
DDR3_A10: RM7.3.1 U3.48
DDR3_A11: RM9.4.1 U3.56
DDR3_A12: RM7.1.1 U3.50
DDR3_A13: RM8.1.1 U3.68
DDR3_A14: RM9.3.1 U3.57
DDR3_BA0: RM5.2.1 U3.63
DDR3_BA1: RM7.2.1 U3.49
DDR3_BA2: RM5.3.1 U3.61
DDR3_CAS: RM9.1.1 U3.59
DDR3_CK: R87.2 U3.45
DDR3_CK_N: R88.2 U3.46
DDR3_CKE: RM7.4.1 U3.47
DDR3_D0: RM1.1.1 U3.22
DDR3_D1: RM3.4.1 U3.40
DDR3_D2: RM1.2.1 U3.21
DDR3_D3: RM3.3.1 U3.41
DDR3_D4: RM1.4.1 U3.19
DDR3_D5: RM3.1.1 U3.44
DDR3_D6: RM1.3.1 U3.20
DDR3_D7: RM3.2.1 U3.42
DDR3_D8: RM2.3.1 U3.37
DDR3_D9: RM4.3.1 U3.25
DDR3_D10: RM2.1.1 U3.39
DDR3_D11: RM4.4.1 U3.24
DDR3_D12: RM2.4.1 U3.36
DDR3_D13: RM4.2.1 U3.26
DDR3_D14: RM2.2.1 U3.38
DDR3_D15: RM4.1.1 U3.27
DDR3_DM0: R92.2 U3.29
DDR3_DM1: R91.2 U3.28
DDR3_DQS0: R93.2 U3.31
DDR3_DQS0_N: R94.2 U3.32
DDR3_DQS1: R89.2 U3.33
DDR3_DQS1_N: R90.2 U3.34
DDR3_ODT: RM10.1.2 U1.G1 U2.G1
DDR3_ODTT: RM10.1.1 U3.72
DDR3_RAS: RM9.2.1 U3.58
DDR3_RST: C144.1 RM10.3.2 U1.N2 U2.N2
DDR3_RSTT: RM10.3.1 U3.70
DDR3_WE: RM5.4.1 U3.60
DM1: U11.27 USB_HOST1.2
DM2: U11.2 USB_HOST2.2
DM3: U11.8 USB_HOST3.2
DM4: U11.11 WIFI.2
DP1: U11.28 USB_HOST1.3
DP2: U11.3 USB_HOST2.3
DP3: U11.9 USB_HOST3.3
DP4: U11.12 WIFI.3
DQM0: R92.1 U1.B7
DQM1: R91.1 U2.B7
DQS0: R93.1 U1.C3
DQS0_N: R94.1 U1.D3
DQS1: R89.1 U2.C3
DQS1_N: R90.1 U2.D3
DVDD: C108.1 C109.1 L9.1 R54.1 R56.1 U11.16 U11.24
DZQ: R13.2 U3.17
EXTEN: U9.20 U15.1 U16.4
GND [pwr]: 3.0V_BAT.2 C2.1 C3.1 C4.1 C5.1 C6.1 C7.1 C8.1 C9.1 C10.1 C11.1 C12.1 C13.1 C14.1 C15.1 C16.1 C17.1 C18.1 C19.1 C20.1 C21.1 C22.1 C23.1 C24.1 C25.1 C26.1 C27.1 C28.1 C29.1 C31.1 C32.1 C33.1 C34.1 C35.1 C36.1 C37.1 C38.1 C39.1 C40.1 C41.1 C42.1 C43.1 C44.1 C45.1 C46.1 C47.1 C48.1 C49.1 C50.1 C51.1 C52.1 C53.1 C54.1 C55.1 C57.1 C58.1 C59.1 C60.1 C61.1 C62.1 C63.1 C64.1 C65.1 C66.1 C67.1 C68.1 C69.1 C70.1 C71.1 C72.1 C73.1 C74.1 C76.2 C77.2 C78.2 C79.1 C80.2 C81.2 C82.2 C83.2 C84.2 C85.2 C86.2 C87.2 C88.2 C89.1 C90.2 C91.- C92.2 C93.2 C94.1 C95.1 C96.2 C97.2 C98.2 C99.- C100.2 C101.2 C102.2 C103.1 C104.1 C105.2 C106.2 C107.- C108.2 C109.2 C110.2 C111.2 C112.2 C113.2 C115.2 C116.2 C117.- C118.2 C119.2 C120.1 C121.2 C122.2 C125.1 C126.- C127.2 C128.2 C129.2 C130.2 C131.1 C132.2 C133.2 C135.1 C136.1 C137.2 C138.2 C139.2 C140.2 C141.2 C142.- C143.- C144.2 D2.1 D3.1 D4.1 D5.1 D6.1 D8.A FET1.2 FET2.2 FET4.2 GND_PIN.P$1 GPIO-1.2 GPIO-1.4 GPIO-2.2 GPIO-2.4 JTAG.6 L5.1 L12.1 LCD_CON.2 LCD_CON.4 LIPO_BAT.2 MIC.5 P0.1 PWR.- PWR.-- PWR_BUT.P$1 PWR_LED.C R2.1 R7.2 R10.1 R11.1 R12.1 R13.1 R15.2 R23.1 R42.1 R46.1 R48.1 R52.1 R57.2 R59.1 R63.1 R65.2 R66.1 R67.1 R68.1 R69.1 R73.2 R74.2 R85.2 R86.2 R95.1 R96.2 SD.6 SW1.P$1 SW2.P$1 SW3.P$1 SW4.P$1 SW5.P$1 U1.A1 U1.A8 U1.B1 U1.B2 U1.B8 U1.C9 U1.D1 U1.D8 U1.D9 U1.F2 U1.F8 U1.H2 U1.J1 U1.J9 U1.L1 U1.L9 U1.N1 U1.N9 U2.A1 U2.A8 U2.B1 U2.B2 U2.B8 U2.C9 U2.D1 U2.D8 U2.D9 U2.F2 U2.F8 U2.H2 U2.J1 U2.J9 U2.L1 U2.L9 U2.N1 U2.N9 U3.79 U3.GND_PAD U3.P$2 U3.P$3 U3.P$4 U3.P$5 U3.P$6 U3.P$7 U3.P$8 U3.P$9 U3.P$10 U3.P$11 U3.P$12 U3.P$13 U3.P$14 U3.P$15 U3.P$16 U3.P$17 U3.P$18 U4.13 U4.36 U5.2 U5.4 U5.10 U6.2 U6.4 U6.10 U7.2 U7.4 U7.10 U8.2 U9.9 U9.16 U9.22 U9.46 U9.N1 U9.N2 U9.N3 U9.N4 U9.N5 U9.N6 U9.N7 U9.N8 U9.N9 U9.N10 U9.N11 U9.N12 U9.N13 U9.N14 U9.N15 U9.N16 U9.N17 U9.VSS U10.2 U11.14 U11.15 U12.2 U13.4 U14.4 U15.2 U16.2 U$4.GND U$4.P$2 U$4.P$3 U$4.P$4 UART0.4 UART1.4 UEXT.2 USB_HOST1.4 USB_HOST2.4 USB_HOST3.4 USB_OTG.GND VGA_DB15-F.5 VGA_DB15-F.6 VGA_DB15-F.7 VGA_DB15-F.8 VGA_DB15-F.10 VGA_DB15-F.GND1 VGA_DB15-F.GND2 WIFI.4
IPSOUT: C73.2 C78.1 C85.1 C88.1 C95.2 C102.1 C113.1 C133.1 C136.2 CHGLED.A L14.1 P5.1 RESET.P$2 U9.7 U9.13 U9.14 U9.21 U9.34 U9.35 U9.40 U9.44 U10.4 U15.4 U16.5
LCD_CLK: LCD_CON.31 U3.129
LCD_D2: LCD_CON.21 LCD_CON.22 LCD_CON.23 U3.148 U7.6
LCD_D3: LCD_CON.24 U3.147 U7.8
LCD_D4: LCD_CON.25 U3.146 U7.11
LCD_D5: LCD_CON.26 U3.145 U7.13
LCD_D6: LCD_CON.27 U3.144 U7.15
LCD_D7: LCD_CON.28 U3.143 U7.17
LCD_D10: LCD_CON.13 LCD_CON.14 LCD_CON.15 U3.141 U6.6
LCD_D11: LCD_CON.16 U3.140 U6.8
LCD_D12: LCD_CON.17 U3.139 U6.11
LCD_D13: LCD_CON.18 U3.138 U6.13
LCD_D14: LCD_CON.19 U3.137 U6.15
LCD_D15: LCD_CON.20 U3.136 U6.17
LCD_D18: LCD_CON.5 LCD_CON.6 LCD_CON.7 U3.135 U5.6
LCD_D19: LCD_CON.8 U3.134 U5.8
LCD_D20: LCD_CON.9 U3.133 U5.11
LCD_D21: LCD_CON.10 U3.132 U5.13
LCD_D22: LCD_CON.11 U3.131 U5.15
LCD_D23: LCD_CON.12 U3.130 U5.17
LCD_DE: LCD_CON.32 R43.1 U3.128
LCD_HSYNC: LCD_CON.29 R99.1 U3.127
LCD_VSYNC: LCD_CON.30 R98.1 U3.126
LRADC: C60.2 C139.1 R76.2 R79.1 U3.86
N$1: C58.2 C59.2 U3.75
N$2: C30.2 C38.2 C45.2 C46.2 R6.1 R11.2 U1.E1 U1.J8 U2.E1 U2.J8
N$3: R10.2 U1.H8
N$4: R45.2 U9.36
N$5: R12.2 U2.H8
N$6 [pwr]: HOST_EN.2 R47.2 R95.2 U8.4
N$7: R96.1 SD.10 SD.11 SD.12 SD.13
N$8: L10.1 U10.3
N$9: C31.2 C32.2 U3.80
N$10: D1.C R5.2
N$11 [pwr]: 5V_E_WIFI.2 C121.1 C122.1 WIFI-3.3V/5V_USB.2 WIFI.1
N$12: #CE_NAND_E.2 U3.2
N$13: C33.2 U3.83
N$14: C34.2 C35.2 R7.1 U3.82
N$15: FET1.1 R98.2
N$16: C53.2 C56.1 MIC.2 MIC.3 R8.2
N$17: FET2.1 R99.2
N$18: 1.5V_E.1 C114.1 C115.1 C116.1 L10.2 R62.1
N$19: C114.2 R62.2 R65.1 U10.5
N$20: R37.1 U7.5
N$21: FET4.1 R43.2 R44.1
N$22: C54.2 R8.1 R9.2
N$23: C132.1 D9.K FET3.3 R78.2
N$24: C131.2 D10.3 U14.8
N$25: C56.2 U3.84
N$26: HEADPHONES.2 RM11.2.2 U3.74
N$27: HEADPHONES.5 RM11.3.2 U3.77
N$28: HEADPHONES.3 RM11.1.2 U3.78
N$29: 3.0V_BAT.1 D10.2
N$30: D11.3 UART1.3
N$31: C126.+ D8.C P8.1 PWR.+ R70.1 U13.2
N$34: C62.2 RM11.2.1
N$35: C63.2 RM11.3.1
N$36: C127.1 U13.8
N$37: R70.2 U13.7
N$38: PWR_BUT.P$2 R53.1
N$42: LED1.C R52.2
N$43: CHGLED.C R45.1
N$44: C64.2 RM11.1.1
N$46: C123.1 U13.1
N$50: C123.2 L13.1 U13.3
N$60: C124.1 U13.6
N$61: C124.2 R73.1
N$62: R71.1 R74.1 U13.5
N$64: L15.1 U15.3
N$65: 3.3V_E.1 C134.1 C137.1 C138.1 C142.+ L15.2 R84.1
N$66: C134.2 R84.2 R86.1 U15.5
N$88: R79.2 R80.1 SW1.P$2
N$89: R80.2 R81.1 SW2.P$2
N$90: R81.2 R82.1 SW3.P$2
N$91: R82.2 R83.1 SW4.P$2
N$99: R68.2 U12.3
N$100: C117.+ L11.2 R64.2 U12.1
N$101: R48.2 U8.3
N$102: R66.2 U11.4
N$103: R40.1 U7.3
N$104: R30.1 U7.9
N$105: R54.2 U11.18
N$106: R56.2 U11.17
N$107: R33.1 U7.7
N$108: R22.1 U7.14
N$109: R26.1 U7.12
N$110: L5.2 USB_HOST1.P$3 USB_HOST1.P$4 USB_HOST2.P$3 USB_HOST2.P$4 USB_HOST3.P$3 USB_HOST3.P$4
N$111: C90.1 L6.2 USB_HOST1.1
N$112: C97.1 L7.2 USB_HOST2.1
N$113: C105.1 L8.2 USB_HOST3.1
N$114: C91.+ C99.+ C107.+ L6.1 L7.1 L8.1 R58.2 U8.1 WIFI-3.3V/5V_USB.1
N$117: R29.1 U6.9
N$118: R32.1 U6.7
N$119: C104.2 R55.1 R57.1 U11.13
N$120: R46.2 U9.23
N$121: C130.1 Q3.1 U14.1
N$122: Q3.4 U14.2
N$123: D9.A L14.2 U16.1
N$124: C72.2 R16.2 U4.19
N$125: R23.2 U9.37
N$126: R78.1 R85.1 U16.3
N$127: L2.1 U9.45
N$128: C75.1 C76.1 L2.2 R27.1 U9.43
N$129: PWR_LED.A R72.2
N$130: L3.1 U9.8
N$131: L4.1 U9.15
N$132: C94.2 U9.24
N$133 [pwr]: 3.3V_OPTION.1 C106.1 U9.11
N$134: C74.2 R34.1
N$135: C79.2 R41.1
N$138: R36.1 U6.5
N$139: C103.2 R53.2 U9.47
N$140: R59.2 RESET.P$1 U9.4
N$172: R39.1 U6.3
N$173: R21.1 U6.14
N$174: R25.1 U6.12
N$177: R28.1 U5.9
N$178: R31.1 U5.7
N$179: R35.1 U5.5
N$180: R38.1 U5.3
N$181: R20.1 U5.14
N$182: R24.1 U5.12
N$266: L12.2 USB_OTG.GND1 USB_OTG.GND2 USB_OTG.GND3 USB_OTG.GND4
NMI_N: GPIO-1.6 R5.1 U3.158 U9.48 U14.3
PIN0: GPIO-1.7 LCD_CON.35 U9.19
PIN1: GPIO-1.9 U9.18
PIN2: GPIO-1.10 U9.5
PIN3: GPIO-1.8 U9.3
PIN4/TWI0-SCK: GPIO-2.5 R60.1 U3.101 U9.2
PIN5/TWI0-SDA: GPIO-2.7 R61.1 U3.102 U9.1
PIN6/PWM0: GPIO-2.9 LCD_CON.36 U3.103
PIN7: GPIO-2.11 LCD_CON.33 U3.150
PIN8: GPIO-2.13 LCD_CON.34 U3.104
PIN9: GPIO-2.15 U3.10
PIN10/TWI1-SCK: GPIO-2.17 R75.1 U3.105 U14.6
PIN11/TWI1-SDA: GPIO-2.19 R77.1 U3.106 U14.5
PIN12/NWE: GPIO-2.21 U3.8 U4.18
PIN13/NALE: GPIO-2.23 U3.7 U4.17
PIN14/NCLE: GPIO-2.25 U3.6 U4.16
PIN15/NCE1: GPIO-2.27 U3.3
PIN16/NCE0: #CE_NAND_E.1 GPIO-2.29 R97.2 U4.9
PIN17/NRE: GPIO-2.31 U3.1 U4.8
PIN18/NRB0: GPIO-2.33 R14.2 U3.176 U4.7
PIN19/NRB1: GPIO-2.35 U3.175
PIN20/NDQ0: GPIO-2.37 U3.174 U4.29
PIN21/NDQ1: GPIO-2.39 U3.172 U4.30
PIN22/NDQ2: GPIO-2.40 U3.171 U4.31
PIN23/NDQ3: GPIO-2.38 U3.170 U4.32
PIN24/NDQ4: GPIO-2.36 U3.168 U4.41
PIN25/NDQ5: GPIO-2.34 U3.167 U4.42
PIN26/NDQ6: GPIO-2.32 U3.166 U4.43
PIN27/NDQ7: GPIO-2.30 U3.165 U4.44
PIN28/NDQS: GPIO-2.28 U3.162
PIN29: GPIO-2.26 U3.118
PIN30: GPIO-2.24 U3.119
PIN31: GPIO-2.22 U3.120
PIN32: GPIO-2.20 U3.121
PIN33: GPIO-2.18 U3.122
PIN34: GPIO-2.16 U3.123
PIN35: GPIO-2.14 U3.124
PIN36: GPIO-2.12 U3.125
PIN37/LED1 [pwr]: GPIO-2.10 LED1.A U3.12
PIN38/VGA_DIS: GPIO-2.8 R44.2 U3.13
PIN39/USBH_EN [pwr]: GPIO-2.6 HOST_EN.1 U3.14
RASN: RM9.2.2 U1.F3 U2.F3
RESET_N: C28.2 C29.2 GPIO-1.5 R4.1 RESET_N.P$1 U3.159 U9.25
SD0CARD-DETECT: RM12.4.2 SD.9 U3.155
SD_VCC: C68.2 C69.2 L1.2 SD.4
SDC0_CMD: JTAG.5 R18.1 SD.3 U3.111
SDC0_DATA0: JTAG.2 RM12.2.2 SD.7 U3.108
SDC0_DATA1: JTAG.3 RM12.3.2 SD.8 U3.107
SDC0_DATA2: JTAG.4 RM12.1.2 SD.1 U3.113
SDC0_DATA3: R15.1 SD.2 U3.112 UART0.3
SDC0_SCK: SD.5 U3.110 UART0.2
SPI2_CLK: U3.115 UEXT.9
SPI2_CS0: R51.1 U3.114 UEXT.10
SPI2_MISO: U3.117 UEXT.7
SPI2_MOSI: U3.116 UEXT.8
SVREF: C1.2 C2.2 C37.2 R1.1 R2.2 U3.18
TPX1: C61.2 LCD_CON.37 U3.89
TPX2: C66.2 LCD_CON.38 U3.87
TPY1: C65.2 LCD_CON.39 U3.90
TPY2: C67.2 LCD_CON.40 U3.88
TWI2_SCK: R49.1 U3.161 UEXT.5
TWI2_SDA: R50.1 U3.160 UEXT.6
UART1_RX: D11.1 R102.1 U3.151 UEXT.4
UART1_TX: U3.152 UART1.2 UEXT.3
UBOOT: R83.2 SW5.P$2 U3.157
UDM0: U3.93 USB_OTG.D-
UDM1: U3.95 U11.25
UDP0: U3.94 USB_OTG.D+
UDP1: U3.96 U11.26
USB0-DRV: R67.2 U3.15 U9.6 U12.4
USB0-IDDET: R17.2 U3.153 USB_OTG.ID
USB0-VBUSDET: C141.1 R64.1 R69.2 U3.154
V+: 1.5V_E.2 C1.1 C12.2 C13.2 C14.2 C15.2 C16.2 C30.1 C39.2 C40.2 C41.2 C42.2 C43.2 C44.2 C47.2 C48.2 C49.2 C50.2 C51.2 C52.2 P1.1 R1.2 R6.2 U1.A2 U1.A9 U1.B9 U1.C1 U1.D7 U1.E2 U1.E9 U1.G2 U1.G8 U1.K1 U1.K9 U1.M1 U1.M9 U2.A2 U2.A9 U2.B9 U2.C1 U2.D7 U2.E2 U2.E9 U2.G2 U2.G8 U2.K1 U2.K9 U2.M1 U2.M9 U3.23 U3.30 U3.43 U3.53 U3.62
VCC [pwr]: 3.3V_E.2 3.3V_OPTION.2 C3.2 C4.2 C17.2 C18.2 C36.2 C57.2 C70.2 C71.2 C80.1 C81.1 C82.1 D1.A D2.2 D3.2 D4.2 GPIO-1.3 GPIO-2.3 JTAG.1 L1.1 LCD_CON.3 P7.1 R4.2 R14.1 R16.1 R17.1 R18.2 R19.2 R47.1 R49.2 R50.2 R51.2 R60.2 R61.2 R75.2 R77.2 R97.1 R102.2 RM12.1.1 RM12.2.1 RM12.3.1 RM12.4.1 U3.5 U3.76 U3.97 U3.100 U3.142 U3.163 U4.12 U4.37 U5.20 U6.20 U7.20 UART0.1 UART1.1 UEXT.1
VCC/2: C5.2 C6.2 C7.2 C8.2 C19.2 C20.2 C21.2 C22.2 C83.1 C84.1 L3.2 P3.1 U3.4 U3.9 U3.11 U3.16 U3.156 U3.164 U3.169 U3.173 U9.10
VCCINT: C9.2 C10.2 C11.2 C23.2 C24.2 C86.1 C87.1 L4.2 P11.1 U3.35 U3.73 U3.98 U3.109 U3.149 U9.17
VDD_RTC: C93.1 D10.1 P2.1 U9.28
VGA_B: D4.3 R22.2 R26.2 R30.2 R33.2 R37.2 R40.2 VGA_DB15-F.3
VGA_CTRL [pwr]: FET4.3 R19.1 R42.2 U5.1 U5.19 U6.1 U6.19 U7.1 U7.19
VGA_G: D3.3 R21.2 R25.2 R29.2 R32.2 R36.2 R39.2 VGA_DB15-F.2
VGA_HSYNC: D5.3 FET2.3 R100.1 VGA_DB15-F.13
VGA_R: D2.3 R20.2 R24.2 R28.2 R31.2 R35.2 R38.2 VGA_DB15-F.1
VGA_VSYNC: D6.3 FET1.3 R101.1 VGA_DB15-F.14
VINT: C89.2 U9.26 U9.27
VMIC: C55.2 R9.1 U3.85
VPP [pwr]: C25.2 C96.1 P4.1 R76.1 U3.81 U9.12 U10.1
WEN: RM5.4.2 U1.H3 U2.H3
WIFI-3V3 [pwr]: C100.1 U9.41 WIFI-3.3V/5V_USB.3
X1: C120.2 Q2.2 U11.6
X2: C125.2 Q2.1 U11.7
XTALI: C26.2 Q1.2 U3.92
XTALO: C27.2 Q1.1 U3.91

## Tracks (layer width: path | path; a pad name or v marks a point on that pad's centre or on a via)
#OVCUR1
  Top 0.356: U11.21 27.61,84.64 R63.2
  Top 1.016: R63.2 R58.1
+5V  (via drill 0.6)
  Top 0.356: 28.91,87.02 U11.23 | 28.91,87.02 v28.71,87.02 | 28.91,84.07 28.91,87.02
  Top 0.508: v21.69,87.02 21.69,88.14 21.13,88.7 20.14,88.7 U8.5 18.86,91.3 C92.1 | 5V_E.2 17.42,32.36 17.4,32.38 | 35.18,75.18 5V_E_WIFI.1
  Top 0.61: v99.42,89.38 100.2,89.38 | 100.2,89.38 R100.2 | v99.42,83.84 R101.2 | C92.1 18.16,91.57 17.48,92.25 17.48,99.16 17.68,99.36 | 23.88,31.9 5V_E.2 | v23.88,31.75 23.88,31.9 | 23.88,31.9 30.58,31.9 | 30.58,31.9 32.05,31.9 34.14,33.98 34.14,54.46 v34.29,54.61 | C119.1 18.35,75.51 | 18.35,75.51 U12.5 | 18.35,75.51 C140.1 | 30.58,31.9 30.58,31.7 | D5.2 100.08,95.02 100.91,95.02 v101.14,94.79 | D6.2 100.2,90.89 100.2,89.38
  Top 0.762: 15.49,33.48 15.49,33.4 16.38,33.4 17.4,32.38 | 15.49,33.48 D7.K | FET3.2 13.52,33.34 13.66,33.48 15.49,33.48 | C101.1 30.53,84.07 31.24,83.36 31.24,77.6 33.66,75.18 35.18,75.18 v35.18,74.4
  Top 1.016: C101.1 28.91,84.07 C98.1 | 20.75,101.37 19.68,101.37 17.68,99.36 | 20.75,101.37 R55.2 | LCD_CON.1 20.75,108.38 20.75,101.37 | v16.79,75.51 C119.1 | 30.58,31.7 C143.+
  Bottom 0.254: 23.88,28.57 P6.1
  Bottom 0.508: 99.42,90.68 99.42,93.12 101.09,94.79 v101.14,94.79 | v99.42,83.84 v99.42,89.38 99.42,90.68 | v16.79,75.51 18.03,75.51 21.49,78.97 21.49,86.82 v21.69,87.02 v28.71,87.02 53.39,87.02 57.05,90.68 99.42,90.68
  Bottom 0.61: v23.88,31.75 23.88,28.57 23.88,3.05 24.59,2.34 75.18,2.34 | 75.18,2.34 94.79,2.34 95.5,3.05 95.5,4.83 95.3,5.03 | 75.18,2.34 75.18,4.83 74.98,5.03 | v34.29,54.61 35.36,55.68 35.36,74.22 v35.18,74.4
  Bottom 1.016: 95.3,5.03 GPIO-1.1 | 74.98,5.03 GPIO-2.1
+5V_OTG_PWR  (via drill 0.4, 0.6)
  Top 0.203: U9.31 20.3,47.81 20.45,47.95
  Top 0.508: R41.2 20.52,48.82 v20.52,48.21 20.52,48.03 20.45,47.95 | USB_OTG.VBUS | v8.74,70.31 USB_OTG.VBUS
  Top 0.61: v19.71,57.25 19.71,61.37 18.49,62.59 15.34,62.59 L11.1
  Top 1.016: L11.1 14.07,63.98 C118.1 v12.04,62.99
  Bottom 0.254: 20.52,53.34 P12.1
  Bottom 0.61: v20.52,48.21 20.52,53.34 20.52,56.44 v19.71,57.25
  Bottom 1.016: v12.04,62.99 8.74,66.29 v8.74,70.31
+15V  (via drill 0.6, 0.8)
  Top 0.203: U9.33 19.5,48.01 19.71,48.01 19.9,48.01 U9.32
  Top 0.508: 17.42,30.89 5V_E.1
  Top 0.61: 19.71,48.01 19.71,48.64 v19.51,48.84 R34.2
  Top 1.016: C128.1 | R71.2 10.29,20.45 9.78,20.95 9.78,28.78 10.59,29.59 C128.1 | C128.1 C129.1 13.16,29.59 | L13.2 21.13,29.59 17.42,29.59 | 15.49,29.59 17.42,29.59 | 15.49,29.59 D7.A | 13.16,29.59 FET3.1 | 13.16,29.59 15.49,29.59 | 17.42,29.59 17.42,30.89 | C128.1 v11.18,30.73 | R72.1 v2.41,46.58 2.87,47.04 v5.59,47.04
  Bottom 0.254: v11.18,30.73 11.3,30.61 P9.1
  Bottom 0.61: v5.59,47.04 5.99,47.45 18.49,47.45 19.51,48.46 v19.51,48.84
  Bottom 1.016: v11.18,30.73 11.18,37.82 v2.41,46.58
+24V  (via drill 0.4, 0.6)
  Top 0.203: 16.03,44.27 16.06,44.24 U9.42 | U9.38 16.86,45.84 16.74,45.72 16.74,45.44 U9.39
  Top 0.254: v15.34,44.68 15.62,44.68 16.03,44.27
  Top 0.61: 16.74,45.72 16.54,45.92 v16.54,46 v16.54,46.63
  Top 1.016: LIPO_BAT.1 5.06,21.01 C135.2 | 7.44,42.39 R27.2 | 7.44,42.39 C77.1 v6.45,40.36 | 7.44,42.39 7.44,44.42 | 7.44,44.42 C75.2 | 7.44,44.42 v7.44,45.41
  Bottom 0.254: 3.13,22.94 P10.1
  Bottom 0.61: 16.54,46.53 v16.54,46.63
  Bottom 0.813: 15.34,45.21 15.75,45.21 v16.54,46 16.54,46.53 | v7.44,45.41 7.64,45.21 15.34,45.21 | 15.34,45.21 v15.34,44.68
  Bottom 1.016: LIPO_BAT.1 3.13,22.94 1.32,24.75 1.32,35.23 v6.45,40.36
A0  (via drill 0.25, 0.25 pad 0.46)
  Top 0.152: RM5.1.2 88.16,54.05 88.16,50.67 87.76,50.27 87.76,28.19 82.55,22.99 78.88,22.99 78.27,23.6 v78.03,23.6 77.38,23.6 76.22,24.75 76.22,28.21 75.26,29.17 U2.K3 | U1.K3 60.24,29.17 61.21,28.19 61.21,25.88 63.5,23.6 v64.44,23.6
  Bottom 0.152: v64.44,23.6 v78.03,23.6
A1  (via drill 0.25 pad 0.46)
  Top 0.127: 78.61,27.97 79.11,27.97 79.31,27.77 79.31,27.37 79.51,27.17 79.91,27.17
  Top 0.152: U2.L7 78.51,27.97 78.61,27.97 | 79.91,27.17 79.94,27.17 80.12,26.98 80.5,26.98 81.66,28.13 v81.66,28.4 81.81,28.55 83.8,28.55 84.71,29.46 84.71,47.83 84.2,48.33 RM6.3.2 | U1.L7 v63.51,28.77
  Bottom 0.127: 63.96,28.27 64.54,28.27
  Bottom 0.152: v81.66,28.4 81.16,27.89 80.11,27.89 80.01,27.79 72.57,27.79 71.96,27.18 67.56,27.18 66.95,27.79 65.02,27.79 64.54,28.27 | v63.51,28.77 63.51,28.72 63.96,28.27
A2  (via drill 0.25, 0.25 pad 0.46)